# Allegro board FLASHLIGHT_V22.brd
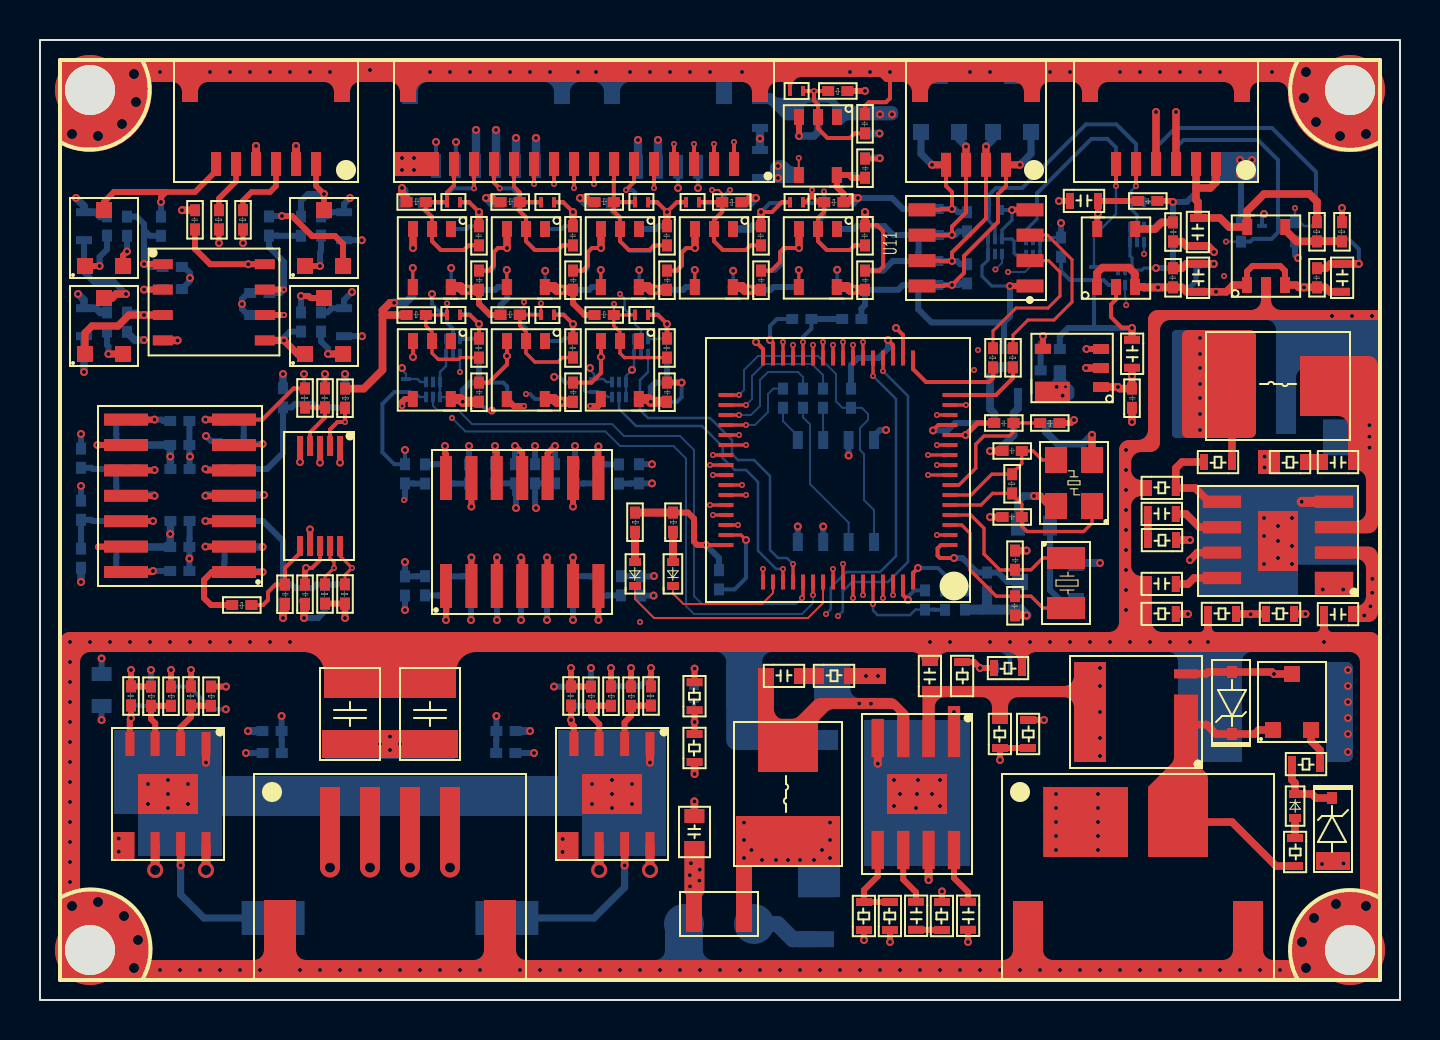
[diagram p0: board, top side]
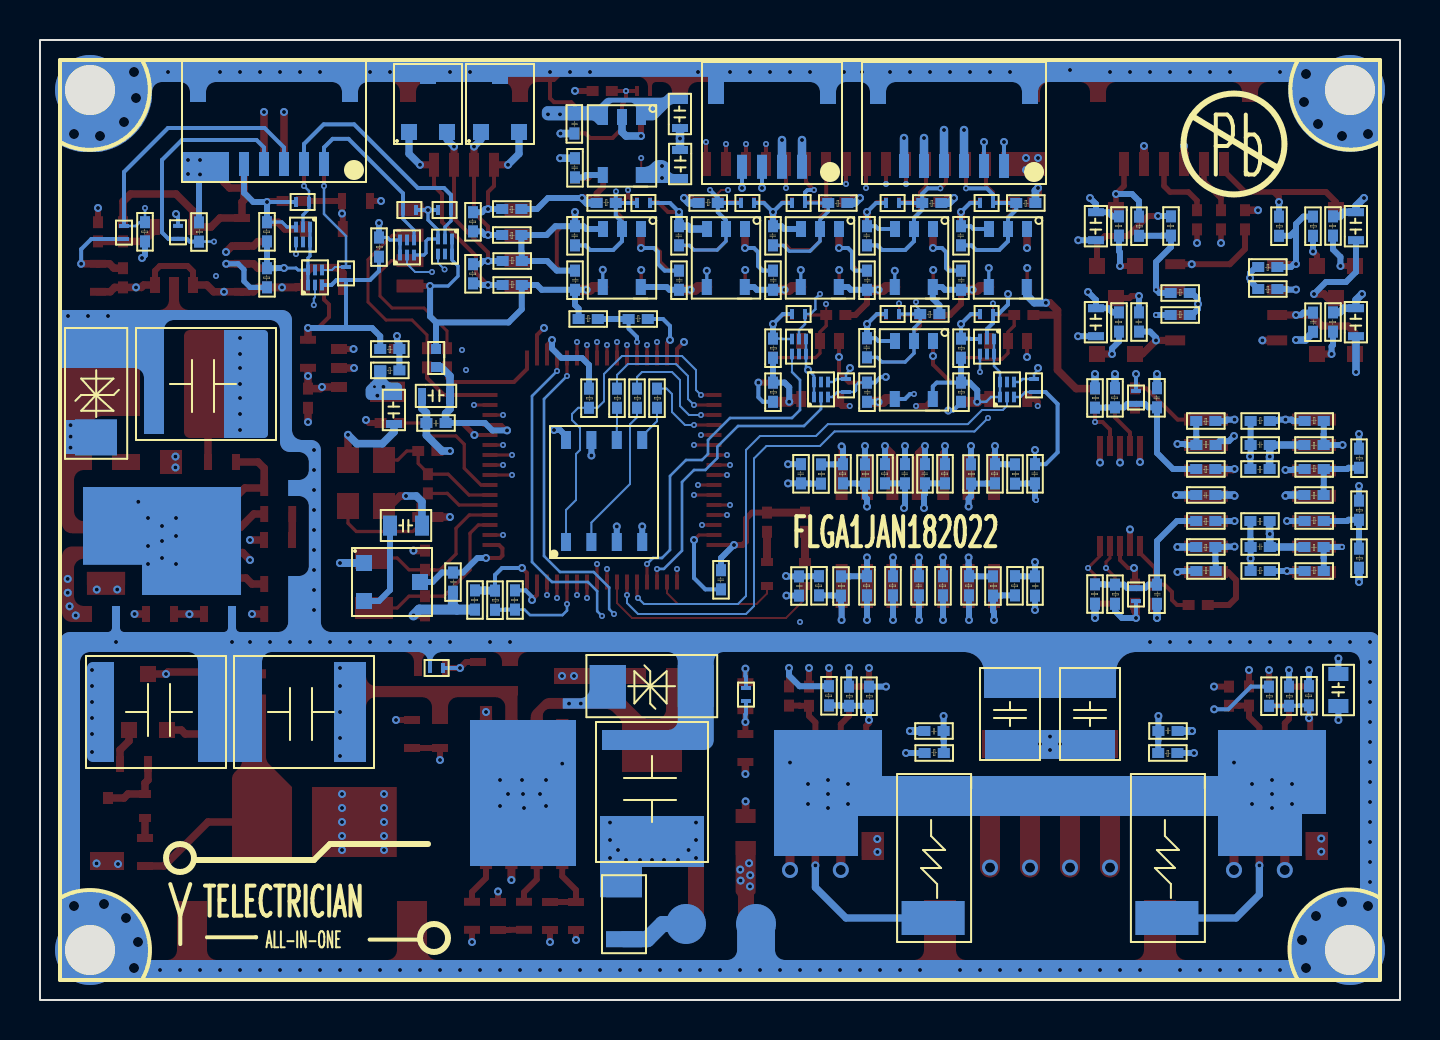
[diagram p1: board, bottom side, seen from below]

Outline 68 x 48 mm; copper layers: TOP, GND-2, SIGNAL-3, VCC-4, GND-5, SIGNAL-6, GND-7, BOTTOM. Coordinates in mm from the lower left corner of the outline.
Outline path: rectangle 0,0 68,48

## Design rules (mm)
constraint set DEFAULT: min track width 0.1

## Placement (name value [footprint] x y rotation side)
BT1  CR1220-3V  [C0805]  50.7 23.1 180 bottom
C1  0.1uF  [C0402]  10.2 25 180 bottom
C2  0.1uF  [C0402]  12.5 19.8 90 top
C3  0.1uF  [C0402]  14 30.59 270 top
C4  0.1uF  [C0402]  6.5 28 0 bottom
C5  0.1uF  [C0402]  6.5 22.9 0 bottom
C6  0.1uF  [C0402]  11.9 19.8 90 bottom
C7  0.1uF  [C0402]  13.5 19.8 90 top
C8  0.1uF  [C0603]  65.7 19.7 180 top
C9  47uF  [C2220]  59.6 14.4 0 bottom
C10  0.1uF  [C0603]  55.29 20.4 0 top
C11  5.6nF  [C0603]  55.29 23.9 0 top
C12  10nF  [C0603]  65.7 27.3 180 top
C13  47uF  [C2220]  62.3 30.8 180 bottom
C14  4.7uF  [C0603]  57.5 36.91 270 top
C15  10uF  [C0603]  51.4 39.55 0 top
C16  0.1uF  [C0402]  56.4 36.6 270 top
C17  0.1uF  [C0402]  56.9 37.91 90 top
C18  10uF  [C0603]  49.9 28.7 90 bottom
C19  4.7uF  [C0603]  54.2 33.11 270 top
C20  0.1uF  [C0402]  54.85 29.6 90 top
C21  0.1uF  [C0402]  47.7 28.6 0 top
C22  22pF  [C0402]  49.1 24.4 180 top
C23  22pF  [C0402]  49.1 27.7 180 top
C24  22pF  [C0402]  48.5 20.2 270 top
C25  22pF  [C0402]  49 21.5 90 top
C26  10uF  [C0805]  3.7 16.5 270 bottom
C27  0.1uF  [C0402]  11.11 13.7 0 bottom
C28  0.1uF  [C0402]  4.3 15.69 270 top
C29  0.1uF  [C0402]  24.3 21.2 270 bottom
C30  0.1uF  [C0402]  18 20.21 90 bottom
C31  10uF  [C0805]  32.1 9.4 270 top
C32  0.1uF  [C0402]  23.79 13.2 180 bottom
C33  0.1uF  [C0402]  26.3 15.69 270 top
C34  0.1uF  [C0402]  29.8 20.21 90 bottom
C35  0.1uF  [C0402]  30.2 26.8 270 bottom
C36  0.1uF  [C0402]  25 26.8 270 bottom
C37  0.1uF  [C0402]  34.2 21.5 270 bottom
C38  0.1uF  [C0402]  31.1 33.09 270 top
C39  0.1uF  [C0402]  26.9 33.1 270 bottom
C40  0.1uF  [C0402]  54.9 39.7 0 top
C41  0.1uF  [C0402]  26.4 29.9 90 bottom
C42  0.1uF  [C0402]  31.6 29.9 90 top
C43  0.1uF  [C0402]  26.9 29.9 90 top
C44  0.1uF  [C0402]  22.2 29.9 90 top
C45  0.1uF  [C0402]  26.4 33.09 270 top
C46  0.1uF  [C0402]  21.7 33.09 270 top
C47  0.1uF  [C0402]  4.1 33.4 90 bottom
C48  0.1uF  [C0402]  7.5 39.5 270 top
C49  0.1uF  [C0402]  13.3 34.39 270 bottom
C50  10uF  [C0603]  36.4 42.6 270 bottom
C51  4.7uF  [C0603]  35.6 43.5 90 bottom
C52  0.1uF  [C0402]  41.03 43.31 90 bottom
C53  0.1uF  [C0402]  41.5 42.1 270 bottom
C54  0.1uF  [C0402]  41.5 41.1 90 top
C55  0.1uF  [C0402]  41 35.5 90 bottom
C56  0.1uF  [C0402]  41 44.3 270 top
C57  0.1uF  [C0402]  41.5 38.7 270 bottom
C58  0.1uF  [C0402]  41.5 35.5 90 top
C59  0.1uF  [C0402]  22.2 35.5 90 top
C60  0.1uF  [C0402]  21.7 38.7 270 top
C61  0.1uF  [C0402]  41 38.7 270 top
C62  0.1uF  [C0402]  21.7 35.5 90 bottom
C63  0.1uF  [C0402]  26.9 35.5 90 top
C64  0.1uF  [C0402]  26.4 35.5 90 bottom
C65  0.1uF  [C0402]  22.2 38.7 270 bottom
C66  0.1uF  [C0402]  26.4 38.7 270 top
C67  0.1uF  [C0402]  26.9 38.7 270 bottom
C68  0.1uF  [C0402]  31.6 35.5 90 top
C69  0.1uF  [C0402]  31.1 35.5 90 bottom
C70  0.1uF  [C0402]  36.3 35.5 90 top
C71  0.1uF  [C0402]  35.8 35.5 90 bottom
C73  0.1uF  [C0402]  36.3 38.7 270 bottom
C74  0.1uF  [C0402]  35.8 38.7 270 top
C75  0.1uF  [C0402]  31.6 38.7 270 bottom
C76  0.1uF  [C0402]  31.1 38.7 270 top
C77  5.6nF  [C0603]  43.4 5.01 270 top
C78  10nF  [C0603]  36.4 15.8 0 top
C79  47uF  [C2220]  37.4 13 270 bottom
C80  0.1uF  [C0603]  46 5.01 270 top
C81  47uF  [C2220]  57.4 14.4 180 bottom
C82  0.1uF  [C0402]  12.4 30.6 270 bottom
C83  10uF  [C0603]  1.8 37.89 90 bottom
C84  10uF  [C0603]  14.8 37.89 90 bottom
C85  10uF  [C0603]  1.8 33.09 90 bottom
C86  10uF  [C0603]  14.8 33.09 90 bottom
C87  0.1uF  [C0402]  18.5 26.8 270 bottom
C88  0.1uF  [C0402]  24 26.8 270 bottom
C89  0.1uF  [C0402]  47.1 20.41 90 bottom
C90  0.1uF  [C0402]  48.69 28.6 180 bottom
C91  10uF  [C0603]  49 29.8 180 bottom
C95  0.1uF  [R0402]  21.7 29.9 90 bottom
C100  0.1uF  [R0402]  21.7 32.1 90 bottom
C101  0.1uF  [R0402]  31.1 29.9 90 bottom
C102  0.1uF  [R0402]  31.1 32.1 90 bottom
C103  0.1uF  [R0402]  56.9 38.9 270 bottom
C104  0.1uF  [R0402]  56.9 36.6 270 bottom
C105  0.1uF  [R0402]  50.8 37.16 90 bottom
C106  0.1uF  [R0402]  46.5 20.49 270 bottom
C107  4.7uF  [C0603]  64.7 36.91 270 top
C108  0.1uF  [C0402]  63.6 36.6 270 top
C109  10uF  [C0603]  58.3 37.6 90 top
C110  0.1uF  [C0603]  44.9 15.4 90 top
C111  10uF  [C1210]  19.5 12.9 90 top
C112  10uF  [C1210]  15.5 12.9 90 top
C113  10uF  [C1210]  19.5 12.9 90 bottom
C114  10uF  [C1210]  15.5 12.9 90 bottom
D1  BZT52C36V  [SOD-123]  64.6 10.1 270 top
D2  RED  [LED0402]  62.5 10.2 270 top
D3  SS35  [DO-214AC]  63.8 28 90 bottom
D4  BLUE  [LED0402]  30 20.8 90 top
D5  BLUE  [LED0402]  31.9 20.8 90 top
D25  ESD4.5V88D-C  [DFN-1006DN]  37.5 45.45 0 top
D26  ESD4.5V88D-C  [DFN-1006DN]  37.5 39.85 0 bottom
D27  ESD4.5V88D-C  [DFN-1006DN]  37.5 39.9 0 top
D28  ESD4.5V88D-C  [DFN-1006DN]  21 39.9 180 top
D29  ESD4.5V88D-C  [DFN-1006DN]  21 39.85 180 bottom
D30  ESD4.5V88D-C  [DFN-1006DN]  25.7 39.9 180 top
D31  ESD4.5V88D-C  [DFN-1006DN]  25.7 39.85 180 bottom
D32  ESD4.5V88D-C  [DFN-1006DN]  30.4 39.9 180 top
D33  ESD4.5V88D-C  [DFN-1006DN]  30.4 39.85 180 bottom
D34  ESD4.5V88D-C  [DFN-1006DN]  32.3 39.9 0 top
D35  ESD4.5V88D-C  [DFN-1006DN]  32.3 39.85 0 bottom
D36  ESD4.5V88D-C  [DFN-1006DN]  25.7 34.25 180 top
D37  ESD4.5V88D-C  [DFN-1006DN]  21 34.25 180 top
D38  ESD4.5V88D-C  [DFN-1006DN]  25.7 34.3 180 bottom
D39  ESD4.5V88D-C  [DFN-1006DN]  30.4 34.25 180 top
D41  SS35  [DO-214AC]  39.74 14.3 180 bottom
D43  BZT52C5V1  [SOD-123]  59.6 13.3 90 top
D46  ESD4.5V88D-C  [DFN-1006DN]  18.3 30.4 90 bottom
D50  ESD4.5V88D-C  [DFN-1006DN]  21 34.3 180 bottom
D51  ESD4.5V88D-C  [DFN-1006DN]  27.7 30.4 90 bottom
D52  ESD4.5V88D-C  [DFN-1006DN]  30.4 34.3 180 bottom
D53  ESD4.5V88D-C  [DFN-1006DN]  52.7 36 90 bottom
D54  ESD4.5V88D-C  [DFN-1006DN]  55.2 39.9 180 bottom
D55  ESD4.5V88D-C  [DFN-1006DN]  49.2 39.5 0 bottom
D56  ESD4.5V88D-C  [DFN-1006DN]  48.1 39.5 180 bottom
D57  ESD4.5V88D-C  [DFN-1006DN]  48.5 16.6 180 bottom
D58  ESD4.5V88D-C  [DFN-1006DN]  32.7 15.6 270 bottom
D59  ESD4.5V88D-C  [DFN-1006DN]  13.2 19.95 90 bottom
D60  ESD4.5V88D-C  [DFN-1006DN]  13.2 30.45 270 bottom
D61  ESD4.5V88D-C  [DFN-1006DN]  61.1 38.05 90 bottom
D62  ESD4.5V88D-C  [DFN-1006DN]  63.8 38.7 270 bottom
J3  Header1x4  [SMD-SH1D0-4P-HOR]  31.4 42.4 0 bottom
J4  Header1x16  [SMD-SH1D0-16P-HOR]  27.2 42.5 180 top
J7  Header1x4  [SMD-PH2D0-4P-HOR]  17.5 7 0 top
J8  Header1x6  [SMD-SH1D0-6P-HOR]  11.3 42.5 180 top
J9  Header1x4  [SMD-PH2D0-4P-HOR]  54.9 7 0 top
J11  Header1x6  [SMD-SH1D0-6P-HOR]  56.3 42.5 180 top
J12  Header1x6  [SMD-SH1D0-6P-HOR]  22.3 42.4 0 bottom
J13  Header1x4  [SMD-SH1D0-4P-HOR]  46.8 42.5 180 top
J14  Header1x6  [SMD-SH1D0-6P-HOR]  56.3 42.5 0 bottom
L1  10uH  [IND-5D7X5D2X1D8]  64 30.7 180 top
L2  10uH  [IND-5D7X5D2X1D8]  37.4 12.4 270 top
L3  1uH  [L1206]  35.2 4.3 180 top
L4  1uH  [L1206]  38.8 5.54 270 bottom
L6  BLM15BD182SN1D  [FB0402]  48.44 32.6 270 bottom
NOREF  -  []  7.16 14.26 90 top
NOREF#2  -  []  17.87 39.51 90 top
NOREF#3  -  []  2.96 37.76 0 top
NOREF#4  -  []  13.86 29.16 0 top
NOREF#5  -  []  29.16 16.13 0 top
NOREF#6  -  []  5.16 14.25 90 top
NOREF#7  -  []  44.09 17 0 top
NOREF#8  -  []  40.86 35.05 90 top
NOREF#9  -  []  33.65 39.51 0 top
NOREF#10  -  []  22.75 35.5 90 top
NOREF#11  -  []  37.76 31.03 0 top
NOREF#12  -  []  27.04 31.67 90 top
NOREF#13  -  []  27.94 14.25 90 top
NOREF#14  -  []  6.06 26.16 0 top
NOREF#15  -  []  10.67 11.96 0 top
NOREF#16  -  []  40.79 5 0 top
NOREF#17  -  []  49.55 28.46 0 top
NOREF#18  -  []  56.1 22.3 90 top
NOREF#19  -  []  25.74 19.77 90 top
NOREF#20  -  []  7.93 22.26 90 top
NOREF#21  -  []  39.84 35.65 90 top
NOREF#22  -  []  33.35 7.4 90 top
NOREF#23  -  []  17.77 39.46 0 top
NOREF#24  -  []  30.96 31.66 90 top
NOREF#25  -  []  40.45 41.1 90 top
NOREF#26  -  []  40.86 42.53 90 top
NOREF#27  -  []  21.56 31.65 90 top
NOREF#28  -  []  40.79 3.4 90 top
NOREF#29  -  []  56.26 37.47 0 top
NOREF#30  -  []  6.05 29.34 0 top
NOREF#31  -  []  46.96 21.84 0 top
NOREF#32  -  []  24.14 25.37 90 top
NOREF#33  -  []  12.66 37.75 90 top
NOREF#34  -  []  8.77 26.16 0 top
NOREF#35  -  []  56.26 35.17 0 top
NOREF#36  -  []  3.74 32.96 90 top
NOREF#37  -  []  40.86 40.67 0 top
NOREF#38  -  []  8.16 16.13 0 top
NOREF#39  -  []  28.05 38.55 0 top
NOREF#40  -  []  40.86 37.27 0 top
NOREF#41  -  []  3.96 32.95 90 top
NOREF#42  -  []  58.31 35.31 90 top
NOREF#43  -  []  20.54 30.05 90 top
NOREF#44  -  []  56.26 39.34 0 top
NOREF#45  -  []  41.64 37.27 90 top
NOREF#46  -  []  56.89 25.2 90 top
NOREF#47  -  []  24.96 19.77 0 top
NOREF#48  -  []  49.81 12.5 90 top
NOREF#49  -  []  27.56 19.76 90 top
NOREF#50  -  []  47.26 31.17 0 top
NOREF#51  -  []  24.44 19.77 90 top
NOREF#52  -  []  13.44 32.96 90 top
NOREF#53  -  []  41.64 35.05 90 top
NOREF#54  -  []  1.66 26.15 90 top
NOREF#55  -  []  14.64 29.17 90 top
NOREF#56  -  []  12.86 29.16 90 top
NOREF#57  -  []  18.86 25.36 90 top
NOREF#58  -  []  13.86 19.35 90 top
NOREF#59  -  []  14.8 34.69 0 top
NOREF#60  -  []  63.46 35.17 90 top
NOREF#61  -  []  65.51 35.31 90 top
NOREF#62  -  []  25.85 29.9 90 top
NOREF#63  -  []  47.26 31.17 90 top
NOREF#64  -  []  32.15 35.5 0 top
NOREF#65  -  []  22.47 39.46 90 top
NOREF#66  -  []  5.6 32.4 0 top
NOREF#67  -  []  35.6 45.1 0 top
NOREF#68  -  []  38.9 44.15 0 top
NOREF#69  -  []  10.05 35.74 0 top
NOREF#70  -  []  22.75 29.9 0 top
NOREF#71  -  []  63.46 35.17 0 top
NOREF#72  -  []  23.14 25.37 90 top
NOREF#73  -  []  26.26 36.93 0 top
NOREF#74  -  []  12.66 39.63 0 top
NOREF#75  -  []  22.57 34.64 0 top
NOREF#76  -  []  23.24 19.77 90 top
NOREF#77  -  []  37.95 44.15 0 top
NOREF#78  -  []  50 33.15 0 top
NOREF#79  -  []  6.05 21.84 0 top
NOREF#80  -  []  14.8 39.49 0 top
NOREF#81  -  []  36.76 29.15 90 top
NOREF#82  -  []  50 30.05 90 top
NOREF#83  -  []  49.57 31.09 90 top
NOREF#84  -  []  29.94 35.65 90 top
NOREF#85  -  []  11.84 37.76 90 top
NOREF#86  -  []  25.85 35.5 90 top
NOREF#87  -  []  11.76 19.35 90 top
NOREF#88  -  []  13.66 32.96 0 top
NOREF#89  -  []  47.67 24.54 0 top
NOREF#90  -  []  11.8 32.4 90 top
NOREF#91  -  []  54.21 31.03 90 top
NOREF#92  -  []  37.35 41.1 0 top
NOREF#93  -  []  7.36 38.07 90 top
NOREF#94  -  []  29.44 19.77 90 top
NOREF#95  -  []  46.81 3.41 90 top
NOREF#96  -  []  47.59 12.5 90 top
NOREF#97  -  []  30.96 31.66 0 top
NOREF#98  -  []  22.57 39.51 90 top
NOREF#99  -  []  56.33 39.56 90 top
NOREF#100  -  []  11.03 19.36 90 top
NOREF#101  -  []  52.25 38.7 0 top
NOREF#102  -  []  6.06 23.56 90 top
NOREF#103  -  []  40.86 37.27 0 top
NOREF#104  -  []  57.49 39.2 0 top
NOREF#105  -  []  55.35 35.5 90 top
NOREF#106  -  []  22.46 19.77 0 top
NOREF#107  -  []  5.66 37.75 90 top
NOREF#108  -  []  61.7 26.49 0 top
NOREF#109  -  []  43.4 5.82 0 top
NOREF#110  -  []  58.1 26.49 0 top
NOREF#111  -  []  46 3.41 0 top
NOREF#112  -  []  49.45 21.1 90 top
NOREF#113  -  []  64.1 18.89 0 top
NOREF#114  -  []  7.93 27.36 90 top
NOREF#115  -  []  53 39.55 90 top
NOREF#116  -  []  55.3 22.59 0 top
NOREF#117  -  []  7.93 28.56 90 top
NOREF#118  -  []  21.56 33.53 0 top
NOREF#119  -  []  55.29 22.3 0 top
NOREF#120  -  []  27.56 21.64 0 top
NOREF#121  -  []  59.9 18.9 90 top
NOREF#122  -  []  38.9 16.61 0 top
NOREF#123  -  []  37.35 41.1 90 top
NOREF#124  -  []  61.2 19.71 0 top
NOREF#125  -  []  27.04 35.05 90 top
NOREF#126  -  []  35.66 37.27 90 top
NOREF#127  -  []  10.66 13.84 0 top
NOREF#128  -  []  18.05 35.5 90 top
NOREF#129  -  []  14.86 31.03 0 top
NOREF#130  -  []  29.66 21.64 0 top
NOREF#131  -  []  29.94 14.25 90 top
NOREF#132  -  []  40.86 36.93 0 top
NOREF#133  -  []  35.66 37.27 0 top
NOREF#134  -  []  28.94 14.27 90 top
NOREF#135  -  []  62.35 6.6 0 top
NOREF#136  -  []  26.26 37.27 0 top
NOREF#137  -  []  2.61 34.69 0 top
NOREF#138  -  []  37.95 38.55 0 top
NOREF#139  -  []  21.56 35.05 90 top
NOREF#140  -  []  35.25 35.5 90 top
NOREF#141  -  []  5.67 36.26 90 top
NOREF#142  -  []  5.16 16.13 0 top
NOREF#143  -  []  32.04 22.95 90 top
NOREF#144  -  []  40.86 36.93 0 top
NOREF#145  -  []  24.23 11.96 90 top
NOREF#146  -  []  64.71 37.47 0 top
NOREF#147  -  []  19.96 19.76 90 top
NOREF#148  -  []  47.67 27.06 90 top
NOREF#149  -  []  6.16 16.13 0 top
NOREF#150  -  []  30.55 35.5 90 top
NOREF#151  -  []  17.86 19.76 90 top
NOREF#152  -  []  22.34 29.45 90 top
NOREF#153  -  []  51.43 28.46 90 top
NOREF#154  -  []  21.15 35.5 90 top
NOREF#155  -  []  56.26 35.17 0 top
NOREF#156  -  []  47.26 28.46 90 top
NOREF#157  -  []  17.87 40.29 0 top
NOREF#158  -  []  0 48 0 top
NOREF#159  -  []  21.56 37.27 90 top
NOREF#160  -  []  40.83 45.06 90 top
NOREF#161  -  []  37.96 41.25 90 top
NOREF#162  -  []  18.05 35.5 0 top
NOREF#163  -  []  18.86 19.77 0 top
NOREF#164  -  []  24.3 38.55 0 top
NOREF#165  -  []  49.57 31.09 0 top
NOREF#166  -  []  29.56 25.37 0 top
NOREF#167  -  []  30.14 22.95 90 top
NOREF#168  -  []  12.66 32.96 0 top
NOREF#169  -  []  24.3 32.95 0 top
NOREF#170  -  []  40.16 29.15 90 top
NOREF#171  -  []  3.35 26.94 0 top
NOREF#172  -  []  47.67 23.76 90 top
NOREF#173  -  []  2.96 32.96 0 top
NOREF#174  -  []  28.16 14.27 0 top
NOREF#175  -  []  17.87 34.64 0 top
NOREF#176  -  []  15.61 33.09 90 top
NOREF#177  -  []  27.04 19.77 90 top
NOREF#178  -  []  13.86 21.23 0 top
NOREF#179  -  []  44.1 40.2 0 top
NOREF#180  -  []  38 15.8 90 top
NOREF#181  -  []  52.85 35.65 90 top
NOREF#182  -  []  23.14 25.37 90 top
NOREF#183  -  []  27.45 35.5 0 top
NOREF#184  -  []  22.34 35.05 90 top
NOREF#185  -  []  23.35 38.55 0 top
NOREF#186  -  []  9.76 38.07 90 top
NOREF#187  -  []  14.86 31.04 0 top
NOREF#188  -  []  12.86 21.23 0 top
NOREF#189  -  []  38.75 39.51 0 top
NOREF#190  -  []  1.66 21.15 90 top
NOREF#191  -  []  8.77 24.86 90 top
NOREF#192  -  []  36.4 16.61 0 top
NOREF#193  -  []  29.66 19.76 90 top
NOREF#194  -  []  5.23 21.06 90 top
NOREF#195  -  []  21.56 31.66 90 top
NOREF#196  -  []  67.3 27.3 90 top
NOREF#197  -  []  5.67 35.16 0 top
NOREF#198  -  []  1.8 34.69 0 top
NOREF#199  -  []  57.5 35.31 0 top
NOREF#200  -  []  32.75 38.55 0 top
NOREF#201  -  []  66.59 28 90 top
NOREF#202  -  []  56.89 20.4 90 top
NOREF#203  -  []  5.67 35.16 90 top
NOREF#204  -  []  13.86 19.36 0 top
NOREF#205  -  []  13.86 19.36 90 top
NOREF#206  -  []  61.7 26.49 90 top
NOREF#207  -  []  19.86 25.37 0 top
NOREF#208  -  []  30.96 37.27 90 top
NOREF#209  -  []  55.29 21.21 0 top
NOREF#210  -  []  11.93 33.86 90 top
NOREF#211  -  []  56.89 19.71 90 top
NOREF#212  -  []  1.8 39.49 0 top
NOREF#213  -  []  40.45 35.5 90 top
NOREF#214  -  []  47.25 28.46 0 top
NOREF#215  -  []  27.16 16.13 0 top
NOREF#216  -  []  48.26 31.17 90 top
NOREF#217  -  []  26.16 14.26 90 top
NOREF#218  -  []  41.64 40.65 90 top
NOREF#219  -  []  8.77 28.56 0 top
NOREF#220  -  []  30.96 29.45 90 top
NOREF#221  -  []  3.36 24.86 0 top
NOREF#222  -  []  22.57 33.91 90 top
NOREF#223  -  []  2.45 14.5 90 top
NOREF#224  -  []  23.36 25.37 0 top
NOREF#225  -  []  40.86 42.87 0 top
NOREF#226  -  []  60.35 35.75 90 top
NOREF#227  -  []  30.96 31.33 0 top
NOREF#228  -  []  64.7 35.31 0 top
NOREF#229  -  []  44.1 35.7 0 top
NOREF#230  -  []  40.86 37.27 90 top
NOREF#231  -  []  17.77 39.46 90 top
NOREF#232  -  []  8.76 21.84 0 top
NOREF#233  -  []  39.03 33.66 90 top
NOREF#234  -  []  48.36 18.77 0 top
NOREF#235  -  []  17.87 33.86 90 top
NOREF#236  -  []  46.64 19.06 90 top
NOREF#237  -  []  22.47 39.46 0 top
NOREF#238  -  []  48.36 22.93 0 top
NOREF#239  -  []  5.23 23.56 90 top
NOREF#240  -  []  46.74 35.37 90 top
NOREF#241  -  []  44.1 35.7 90 top
NOREF#242  -  []  64.1 18.89 90 top
NOREF#243  -  []  48.26 31.17 0 top
NOREF#244  -  []  50.66 38.59 0 top
NOREF#245  -  []  33.7 38.55 0 top
NOREF#246  -  []  43.47 37.86 0 top
NOREF#247  -  []  6.94 14.25 90 top
NOREF#248  -  []  35.66 36.93 0 top
NOREF#249  -  []  10.05 34.64 0 top
NOREF#250  -  []  60.35 35.75 0 top
NOREF#251  -  []  40.63 39.51 90 top
NOREF#252  -  []  18.64 25.37 90 top
NOREF#253  -  []  43.86 19.06 0 top
NOREF#254  -  []  36.44 37.27 90 top
NOREF#255  -  []  19.96 21.64 0 top
NOREF#256  -  []  35.66 36.93 0 top
NOREF#257  -  []  8.77 23.56 0 top
NOREF#258  -  []  21.56 37.27 0 top
NOREF#259  -  []  1.66 23.03 0 top
NOREF#260  -  []  28.56 25.36 90 top
NOREF#261  -  []  21.56 31.33 0 top
NOREF#262  -  []  25.24 35.65 90 top
NOREF#263  -  []  35.14 17.09 0 top
NOREF#264  -  []  28.94 14.25 90 top
NOREF#265  -  []  38.75 40.24 0 top
NOREF#266  -  []  9.76 38.07 0 top
NOREF#267  -  []  8.56 38.07 90 top
NOREF#268  -  []  37.76 29.15 90 top
NOREF#269  -  []  3.96 34.83 0 top
NOREF#270  -  []  43.45 36.14 0 top
NOREF#271  -  []  22.75 35.5 0 top
NOREF#272  -  []  25.36 25.37 0 top
NOREF#273  -  []  26.26 36.93 0 top
NOREF#274  -  []  22.36 13.06 0 top
NOREF#275  -  []  41.53 33.66 90 top
NOREF#276  -  []  5.94 14.25 90 top
NOREF#277  -  []  6.06 23.56 0 top
NOREF#278  -  []  28.24 25.37 90 top
NOREF#279  -  []  14.44 32.96 90 top
NOREF#280  -  []  48.36 18.77 90 top
NOREF#281  -  []  35.59 41 0 top
NOREF#282  -  []  37.35 41.1 0 top
NOREF#283  -  []  35.53 39.51 90 top
NOREF#284  -  []  22.57 40.29 0 top
NOREF#285  -  []  47.67 27.84 0 top
NOREF#286  -  []  6.16 14.25 90 top
NOREF#287  -  []  32.15 35.5 90 top
NOREF#288  -  []  27.27 40.29 0 top
NOREF#289  -  []  27.16 14.25 90 top
NOREF#290  -  []  35.14 14.3 90 top
NOREF#291  -  []  5.23 28.56 90 top
NOREF#292  -  []  40.16 31.03 0 top
NOREF#293  -  []  19.6 38.55 0 top
NOREF#294  -  []  2.5 45.5 0 top
NOREF#295  -  []  18.86 27.24 0 top
NOREF#296  -  []  40.86 42.87 90 top
NOREF#297  -  []  59.66 39.34 0 top
NOREF#298  -  []  8.77 26.16 90 top
NOREF#299  -  []  57.49 37.6 90 top
NOREF#300  -  []  50.71 28.7 90 top
NOREF#301  -  []  3.36 27.36 90 top
NOREF#302  -  []  26.14 25.37 90 top
NOREF#303  -  []  57.04 37.47 90 top
NOREF#304  -  []  45 5.01 90 top
NOREF#305  -  []  22.57 33.91 0 top
NOREF#306  -  []  26.26 29.45 90 top
NOREF#307  -  []  29 38.55 0 top
NOREF#308  -  []  14.86 19.36 90 top
NOREF#309  -  []  40.5 15.8 90 top
NOREF#310  -  []  46.96 19.95 90 top
NOREF#311  -  []  44.86 20.93 0 top
NOREF#312  -  []  14.86 19.36 0 top
NOREF#313  -  []  27.17 39.46 0 top
NOREF#314  -  []  21.94 19.77 90 top
NOREF#315  -  []  58.1 26.49 90 top
NOREF#316  -  []  36.41 43.5 90 top
NOREF#317  -  []  3.74 37.76 90 top
NOREF#318  -  []  36.44 35.05 90 top
NOREF#319  -  []  56.89 18.9 90 top
NOREF#320  -  []  1.66 25.43 0 top
NOREF#321  -  []  53.05 30.65 90 top
NOREF#322  -  []  3.35 21.84 0 top
NOREF#323  -  []  22.34 37.27 90 top
NOREF#324  -  []  22.75 35.5 0 top
NOREF#325  -  []  53.05 30.65 90 top
NOREF#326  -  []  7.16 14.26 90 top
NOREF#327  -  []  4.16 14.26 90 top
NOREF#328  -  []  34.34 20.07 90 top
NOREF#329  -  []  5.66 39.63 0 top
NOREF#330  -  []  30.96 31.65 90 top
NOREF#331  -  []  40.63 39.46 90 top
NOREF#332  -  []  30.34 25.37 90 top
NOREF#333  -  []  28.06 35.65 90 top
NOREF#334  -  []  27.45 29.9 0 top
NOREF#335  -  []  45.96 37.97 0 top
NOREF#336  -  []  10.67 11.96 90 top
NOREF#337  -  []  4.16 14.26 0 top
NOREF#338  -  []  19.6 32.95 0 top
NOREF#339  -  []  32.15 35.5 0 top
NOREF#340  -  []  65.7 28.11 0 top
NOREF#341  -  []  47.4 29.8 90 top
NOREF#342  -  []  47.59 14.1 0 top
NOREF#343  -  []  26.36 25.36 90 top
NOREF#344  -  []  13.86 29.16 90 top
NOREF#345  -  []  47.4 30.61 0 top
NOREF#346  -  []  21.56 36.93 0 top
NOREF#347  -  []  30.96 36.93 0 top
NOREF#348  -  []  63.16 6.6 90 top
NOREF#349  -  []  27.27 39.51 90 top
NOREF#350  -  []  27.45 35.5 90 top
NOREF#351  -  []  46.74 37.97 90 top
NOREF#352  -  []  30.96 36.93 0 top
NOREF#353  -  []  27.04 29.45 90 top
NOREF#354  -  []  18.05 35.5 0 top
NOREF#355  -  []  62.8 18.9 90 top
NOREF#356  -  []  58.3 19.71 0 top
NOREF#357  -  []  13.66 37.76 0 top
NOREF#358  -  []  44.09 15.4 90 top
NOREF#359  -  []  43.47 39.16 0 top
NOREF#360  -  []  45.33 35.36 90 top
NOREF#361  -  []  44.86 19.05 90 top
NOREF#362  -  []  21.56 31.33 0 top
NOREF#363  -  []  37.35 35.5 0 top
NOREF#364  -  []  54.99 29.15 90 top
NOREF#365  -  []  14.86 29.16 90 top
NOREF#366  -  []  13.64 19.35 90 top
NOREF#367  -  []  27.46 25.37 0 top
NOREF#368  -  []  36.76 31.03 0 top
NOREF#369  -  []  43.45 37.34 0 top
NOREF#370  -  []  49.9 30.3 0 top
NOREF#371  -  []  39.84 41.25 90 top
NOREF#372  -  []  26.26 31.33 0 top
NOREF#373  -  []  40.9 42.86 90 top
NOREF#374  -  []  35.59 41 90 top
NOREF#375  -  []  48.22 24.87 0 top
NOREF#376  -  []  30.96 37.27 0 top
NOREF#377  -  []  27.04 37.27 90 top
NOREF#378  -  []  38.9 38.55 0 top
NOREF#379  -  []  26.26 37.27 90 top
NOREF#380  -  []  12.64 19.35 90 top
NOREF#381  -  []  53 40.36 90 top
NOREF#382  -  []  10.64 21.06 90 top
NOREF#383  -  []  3.36 22.26 90 top
NOREF#384  -  []  50.3 35 90 top
NOREF#385  -  []  22.57 33.86 90 top
NOREF#386  -  []  41.67 44.74 90 top
NOREF#387  -  []  8.76 28.14 0 top
NOREF#388  -  []  64.71 37.47 90 top
NOREF#389  -  []  46.51 15.4 90 top
NOREF#390  -  []  10.64 27.36 90 top
NOREF#391  -  []  27.45 29.9 90 top
NOREF#392  -  []  23.36 30.05 90 top
NOREF#393  -  []  56.26 35.17 90 top
NOREF#394  -  []  6.05 23.04 0 top
NOREF#395  -  []  63.46 37.47 90 top
NOREF#396  -  []  29 32.95 0 top
NOREF#397  -  []  41.64 40.67 90 top
NOREF#398  -  []  57.04 35.17 90 top
NOREF#399  -  []  17.86 25.37 0 top
NOREF#400  -  []  21.56 31.66 0 top
NOREF#401  -  []  5.16 16.13 0 top
NOREF#402  -  []  32.32 15.99 0 top
NOREF#403  -  []  18.66 35.65 90 top
NOREF#404  -  []  57.04 37.46 90 top
NOREF#405  -  []  55.01 31.51 90 top
NOREF#406  -  []  8.77 22.26 90 top
NOREF#407  -  []  23.36 35.65 90 top
NOREF#408  -  []  63.8 32.6 0 top
NOREF#409  -  []  3.36 27.36 0 top
NOREF#410  -  []  3.36 24.86 90 top
NOREF#411  -  []  26.26 31.67 0 top
NOREF#412  -  []  17.86 21.64 0 top
NOREF#413  -  []  35.66 35.05 90 top
NOREF#414  -  []  26.26 31.66 90 top
NOREF#415  -  []  12.54 29.17 90 top
NOREF#416  -  []  37.15 34.44 0 top
NOREF#417  -  []  8.56 38.07 0 top
NOREF#418  -  []  15.64 29.15 90 top
NOREF#419  -  []  26.26 31.66 90 top
NOREF#420  -  []  26.26 37.27 0 top
NOREF#421  -  []  42.09 3.4 90 top
NOREF#422  -  []  21.56 37.27 0 top
NOREF#423  -  []  14.86 19.36 0 top
NOREF#424  -  []  21.06 25.36 90 top
NOREF#425  -  []  11.86 21.23 0 top
NOREF#426  -  []  54.45 39.56 0 top
NOREF#427  -  []  63.46 37.47 0 top
NOREF#428  -  []  54.2 31.51 0 top
NOREF#429  -  []  4.94 14.27 90 top
NOREF#430  -  []  22.75 29.9 0 top
NOREF#431  -  []  27.45 35.5 0 top
NOREF#432  -  []  34.64 35.65 90 top
NOREF#433  -  []  35.53 39.46 90 top
NOREF#434  -  []  2.5 2.5 90 top
NOREF#435  -  []  21.56 36.93 0 top
NOREF#436  -  []  46.74 35.37 90 top
NOREF#437  -  []  63.14 37.47 90 top
NOREF#438  -  []  21.56 29.45 90 top
NOREF#439  -  []  8.77 28.56 90 top
NOREF#440  -  []  8.77 24.86 0 top
NOREF#441  -  []  37.96 35.65 90 top
NOREF#442  -  []  3.96 39.63 0 top
NOREF#443  -  []  8.77 22.26 0 top
NOREF#444  -  []  9.15 19.36 0 top
NOREF#445  -  []  3.35 24.34 0 top
NOREF#446  -  []  29.36 24.83 90 top
NOREF#447  -  []  5.23 26.16 90 top
NOREF#448  -  []  62.5 11.39 0 top
NOREF#449  -  []  28.66 19.77 0 top
NOREF#450  -  []  47.94 31.6 90 top
NOREF#451  -  []  45.86 19.06 0 top
NOREF#452  -  []  26.16 14.25 90 top
NOREF#453  -  []  22.75 29.9 90 top
NOREF#454  -  []  48.22 24.87 90 top
NOREF#455  -  []  30.96 37.27 0 top
NOREF#456  -  []  49.57 32.16 90 top
NOREF#457  -  []  20.54 35.65 90 top
NOREF#458  -  []  47.6 16.19 90 top
NOREF#459  -  []  32.32 14.39 90 top
NOREF#460  -  []  30.96 31.33 0 top
NOREF#461  -  []  7.93 21.06 90 top
NOREF#462  -  []  12.86 29.16 0 top
NOREF#463  -  []  52.85 35.65 0 top
NOREF#464  -  []  49.13 28.46 90 top
NOREF#465  -  []  26.26 19.77 0 top
NOREF#466  -  []  29.94 30.05 90 top
NOREF#467  -  []  39.65 34.44 0 top
NOREF#468  -  []  12.54 13.06 90 top
NOREF#469  -  []  50.7 21.1 90 top
NOREF#470  -  []  33.65 40.24 0 top
NOREF#471  -  []  25.14 25.37 90 top
NOREF#472  -  []  26.26 31.33 0 top
NOREF#473  -  []  31.74 29.45 90 top
NOREF#474  -  []  33.56 20.07 0 top
NOREF#475  -  []  3.96 37.75 90 top
NOREF#476  -  []  13.86 29.17 0 top
NOREF#477  -  []  6.06 26.16 0 top
NOREF#478  -  []  19.64 19.77 90 top
NOREF#479  -  []  7.36 38.07 0 top
NOREF#480  -  []  30.96 33.53 0 top
NOREF#481  -  []  32.1 7.4 90 top
NOREF#482  -  []  32.32 13.4 0 top
NOREF#483  -  []  28.56 27.24 0 top
NOREF#484  -  []  8.77 23.56 90 top
NOREF#485  -  []  11.93 34.96 90 top
NOREF#486  -  []  38.76 31.03 0 top
NOREF#487  -  []  26.16 14.26 0 top
NOREF#488  -  []  59.66 37.46 90 top
NOREF#489  -  []  27.27 34.64 0 top
NOREF#490  -  []  28.16 16.13 0 top
NOREF#491  -  []  30.16 14.26 90 top
NOREF#492  -  []  5.67 36.26 0 top
NOREF#493  -  []  25.24 30.05 90 top
NOREF#494  -  []  22.35 12.74 0 top
NOREF#495  -  []  59.75 38.8 0 top
NOREF#496  -  []  20.64 25.37 90 top
NOREF#497  -  []  4.16 14.27 0 top
NOREF#498  -  []  32.76 35.65 90 top
NOREF#499  -  []  26.16 16.13 0 top
NOREF#500  -  []  31.74 35.05 90 top
NOREF#501  -  []  42.09 5 0 top
NOREF#502  -  []  47.6 16.19 0 top
NOREF#503  -  []  24.36 25.37 0 top
NOREF#504  -  []  3.35 29.34 0 top
NOREF#505  -  []  2.61 37.89 90 top
NOREF#506  -  []  43.47 37.86 90 top
NOREF#507  -  []  49.14 21.05 90 top
NOREF#508  -  []  18.05 29.9 0 top
NOREF#509  -  []  11.76 21.23 0 top
NOREF#510  -  []  15.64 19.36 90 top
NOREF#511  -  []  1.66 23.55 90 top
NOREF#512  -  []  26.26 35.05 90 top
NOREF#513  -  []  44.69 5 0 top
NOREF#514  -  []  0 0 90 top
NOREF#515  -  []  1.66 28.03 0 top
NOREF#516  -  []  11.06 37.76 0 top
NOREF#517  -  []  3.36 22.26 0 top
NOREF#518  -  []  23.66 19.77 0 top
NOREF#519  -  []  37.35 35.5 0 top
NOREF#520  -  []  50.66 36.7 90 top
NOREF#521  -  []  8.94 14.25 90 top
NOREF#522  -  []  37.35 35.5 90 top
NOREF#523  -  []  38.95 45.06 0 top
NOREF#524  -  []  62.5 11.39 90 top
NOREF#525  -  []  62.36 37.47 0 top
NOREF#526  -  []  26.36 27.24 0 top
NOREF#527  -  []  55.3 22.59 90 top
NOREF#528  -  []  47.26 28.46 0 top
NOREF#529  -  []  23.35 32.95 0 top
NOREF#530  -  []  35.66 37.27 0 top
NOREF#531  -  []  43.47 39.16 90 top
NOREF#532  -  []  27.16 16.13 0 top
NOREF#533  -  []  30.16 14.26 0 top
NOREF#534  -  []  38.76 29.15 90 top
NOREF#535  -  []  21.16 19.77 0 top
NOREF#536  -  []  18.05 29.9 90 top
NOREF#537  -  []  21.06 27.24 0 top
NOREF#538  -  []  31.74 37.27 90 top
NOREF#539  -  []  3.7 14.5 90 top
NOREF#540  -  []  49.57 32.16 0 top
NOREF#541  -  []  15.61 37.89 90 top
NOREF#542  -  []  45.33 36.56 90 top
NOREF#543  -  []  62.85 35.6 90 top
NOREF#544  -  []  32.32 11.8 90 top
NOREF#545  -  []  14.44 37.76 90 top
NOREF#546  -  []  44.64 19.06 90 top
NOREF#547  -  []  6.05 28.14 0 top
NOREF#548  -  []  11.76 29.17 0 top
NOREF#549  -  []  18.65 38.55 0 top
NOREF#550  -  []  27.27 33.86 90 top
NOREF#551  -  []  27.17 39.46 90 top
NOREF#552  -  []  6.16 16.13 0 top
NOREF#553  -  []  31.26 24.83 0 top
NOREF#554  -  []  44.69 3.4 90 top
NOREF#555  -  []  30.96 35.05 90 top
NOREF#556  -  []  49 12.5 0 top
NOREF#557  -  []  22.36 13.06 90 top
NOREF#558  -  []  45.7 15.4 0 top
NOREF#559  -  []  55.29 26.01 0 top
Q1  2SB1116  [SOT-23-3]  62.6 14.9 0 top
Q4  NCE55P05S  [SOP-8]  52.3 12.5 90 top
Q5  S8550  [SOT-23-3]  3.2 38.1 0 top
Q6  S8550  [SOT-23-3]  14.2 38.1 0 top
Q7  BAT54CW  [SOT-323]  50.4 20.9 270 bottom
R1  10K  [R0402]  9.21 21.7 0 bottom
R2  DNP  [R0402]  10.2 22.4 180 bottom
R3  5K  [R0402]  10.2 23.7 180 bottom
R4  100  [R0402]  9.6 19.5 0 top
R5  10K  [R0402]  10.2 28.7 180 bottom
R6  100  [R0402]  13 30.59 270 top
R7  DNP  [R0402]  9.21 28 0 bottom
R8  5K  [R0402]  10.2 26.3 180 bottom
R9  10K  [R0402]  3.8 29.2 0 bottom
R10  100  [R0402]  6.5 29.2 0 bottom
R11  DNP  [R0402]  4.79 27.5 180 bottom
R12  5K  [R0402]  3.8 26.8 0 bottom
R13  10K  [R0402]  3.8 21.7 0 bottom
R14  DNP  [R0402]  4.79 22.4 180 bottom
R15  100  [R0402]  6.5 21.7 0 bottom
R16  5K  [R0402]  3.8 24.2 0 bottom
R17  16.2K  [R0402]  15.5 20.79 270 bottom
R18  16.2K  [R0402]  14 19.8 90 bottom
R19  10K  [R0402]  15 20.79 270 top
R20  10K  [R0402]  14 20.79 270 top
R21  10K  [R0402]  15.5 29.6 90 top
R22  2K  [R0603]  62.35 8.2 270 top
R23  200  [R0603]  64.1 12.2 180 top
R24  5.49K  [R0603]  55.29 18.9 0 top
R26  6.49K  [R0603]  56.9 23.4 180 top
R27  10  [R0603]  63.3 27.3 180 top
R28  6.28K  [R0603]  55.29 25.2 0 top
R29  33K  [R0603]  59.7 27.3 180 top
R30  20K  [R0603]  61.2 18.9 0 top
R31  2K  [R0603]  58.3 18.9 0 top
R32  47K  [R0402]  51 32.3 180 bottom
R33  147K  [R0402]  51 31.23 180 bottom
R34  10K  [R0402]  50 28.6 0 top
R37  2K  [R0402]  31.9 23.4 90 top
R38  2K  [R0402]  30 23.4 90 top
R39  10K  [R0402]  5.8 14.7 90 top
R40  10K  [R0402]  7.3 15.69 270 top
R41  1K  [R0402]  6.8 14.7 90 top
R42  1K  [R0402]  8.8 14.7 90 top
R43  0.2  [R2010]  11.65 10.1 270 bottom
R44  1K  [R0402]  12.1 12.1 180 bottom
R45  DNP  [R0402]  5.3 14.7 90 bottom
R46  DNP  [R0402]  4.8 15.7 270 bottom
R47  0  [R0402]  6.3 14.7 90 bottom
R48  5K  [R0402]  23.1 21.2 270 bottom
R49  10K  [R0402]  20.1 20.21 90 bottom
R50  10K  [R0402]  21.8 21.2 270 bottom
R51  1K  [R0402]  19.5 21.2 270 bottom
R52  10K  [R0402]  27.8 14.7 90 top
R53  1K  [R0402]  28.8 14.7 90 top
R54  1K  [R0402]  29.8 14.7 90 top
R55  1K  [R0402]  22.8 12.6 0 bottom
R56  10K  [R0402]  30.3 15.69 270 top
R57  0.2  [R2010]  23.34 10.1 270 bottom
R58  DNP  [R0402]  27.3 14.7 90 bottom
R59  DNP  [R0402]  28.8 15.7 270 bottom
R60  0  [R0402]  26.3 14.7 90 bottom
R61  5K  [R0402]  25.6 21.2 270 bottom
R62  10K  [R0402]  26.9 21.2 270 bottom
R63  10K  [R0402]  27.7 20.21 90 bottom
R64  1K  [R0402]  29.3 21.2 270 bottom
R65  10K  [R0402]  26.5 25.81 90 bottom
R66  10K  [R0402]  28.1 26.8 270 bottom
R67  1K  [R0402]  28.7 25.81 90 bottom
R68  5K  [R0402]  26 26.8 270 bottom
R69  16.2K  [R0603]  33.13 11.8 90 top
R70  2.94K  [R0603]  33.13 14.39 90 top
R71  1Meg  [R0402]  48.35 26.3 270 top
R72  10K  [R0402]  40.3 29.6 90 bottom
R73  33  [R0402]  38.9 29.6 90 bottom
R74  33  [R0402]  36.9 29.6 90 bottom
R75  33  [R0402]  37.9 29.6 90 bottom
R78  0  [R0402]  1.8 26.6 90 bottom
R79  DNP  [R0402]  4.79 25 180 bottom
R80  0  [R0402]  1.8 24 90 bottom
R81  DNP  [R0402]  1.8 21.6 90 bottom
R82  10K  [R0402]  28.7 34.5 180 top
R83  10K  [R0402]  24 34.05 180 bottom
R84  120  [R0402]  46.6 36.8 270 bottom
R85  120  [R0402]  46.6 39.4 270 bottom
R86  0  [R0402]  47.4 32.6 270 top
R87  0  [R0402]  48.4 32.6 270 top
R88  10K  [R0402]  19.3 34.5 180 top
R89  10K  [R0402]  24 34.5 180 top
R90  1K  [R0402]  7.1 35.3 180 bottom
R91  2.5K  [R0402]  3.6 39.19 270 bottom
R92  200  [R0402]  4.1 38.2 90 bottom
R93  1.25K  [R0402]  3.6 34.39 270 bottom
R94  0  [R0402]  8.7 39.5 270 top
R95  DNP  [R0402]  5.8 38.2 90 bottom
R96  DNP  [R0402]  7.1 36.4 180 bottom
R97  1.25K  [R0402]  14.3 34.39 270 bottom
R98  2.5K  [R0402]  14.3 39.19 270 bottom
R99  1K  [R0402]  10.5 34.5 0 bottom
R100  DNP  [R0402]  10.5 35.6 0 bottom
R101  200  [R0402]  11.7 39.19 270 bottom
R102  DNP  [R0402]  12.8 38.2 90 bottom
R103  0  [R0402]  9.9 39.5 270 top
R104  10K  [R0402]  39.2 40.1 0 bottom
R105  10K  [R0402]  39.4 45.2 0 top
R106  10K  [R0402]  23.9 39.6 180 bottom
R107  10K  [R0402]  24 40.15 180 top
R108  10K  [R0402]  19.2 39.6 180 bottom
R109  10K  [R0402]  19.3 40.15 180 top
R110  10K  [R0402]  39.2 39.65 0 top
R112  10K  [R0402]  34.1 40.1 0 bottom
R113  10K  [R0402]  34.1 39.65 0 top
R114  10K  [R0402]  28.6 39.6 180 bottom
R115  10K  [R0402]  28.7 40.15 180 top
R116  10  [R0603]  38.9 15.8 0 top
R117  33K  [R0603]  41.6 3.4 90 top
R118  2.37K  [R0603]  42.9 3.4 90 top
R119  6.28K  [R0603]  45.5 3.4 90 top
R120  20K  [R0603]  48.4 12.5 90 top
R121  2K  [R0603]  49 14.1 270 top
R122  16.2K  [R0402]  15 29.61 90 bottom
R123  8.25K  [R0402]  14.5 30.6 270 bottom
R124  DNP  [R0402]  7.49 23.7 180 bottom
R125  DNP  [R0402]  7.49 26.3 180 bottom
R126  DNP  [R0402]  43.9 36 0 bottom
R127  DNP  [R0402]  43.9 37.2 0 bottom
R128  DNP  [R0402]  44.9 39.3 180 bottom
R129  DNP  [R0402]  44.9 38 180 bottom
R130  DNP  [R0402]  21.2 25.81 90 bottom
R131  10K  [R0402]  20.5 26.8 270 bottom
R132  5K  [R0402]  23 26.8 270 bottom
R133  1K  [R0402]  19 25.81 90 bottom
R134  16.2K  [R0603]  45.7 17 270 top
R135  1.62K  [R0603]  49.2 17 180 top
R144  0  [R0402]  40.1 34.3 0 bottom
R145  DNP  [R0402]  45 19.5 90 bottom
R146  DNP  [R0402]  37.6 34.3 0 bottom
R147  0  [R0402]  44.5 20.49 270 bottom
R148  147K  [R0402]  63.6 38.9 270 top
R149  47K  [R0402]  64.85 38.9 270 top
R156  10K  [R0402]  59.8 37.91 90 bottom
R157  10K  [R0402]  63 38.9 270 bottom
TP1  TEST POINT  [SCREW-3D5-2D5]  2.5 45.5 0 top
TP2  TEST POINT  [SCREW-3D5-2D5]  2.5 2.5 0 top
TP3  TEST POINT  [SCREW-3D5-2D5]  65.5 45.5 0 top
TP4  TEST POINT  [SCREW-3D5-2D5]  65.5 2.5 0 top
TP5  T POINT A  [TP_SMD_CIR_2D0]  32.2 3.8 180 bottom
TP6  T POINT A  [TP_SMD_CIR_2D0]  35.7 3.8 180 bottom
U1  SGM58031XMS10G/TR  [MSOP-10]  15 22.7 180 top
U2  SGM8968-4XS14G/TR  [SOIC-14]  4.3 21.4 90 top
U3  SGM6230  [SOIC-8-EPAD]  59.1 21.1 90 top
U4  SGM2028-3.3  [SOT-23-5]  53.8 37.1 0 top
U5  SGM2028-ADJ  [SOT-23-5]  51.6 31.6 90 top
U6  GD32F303RGT6  [LQFP64]  39.9 26.5 90 top
U7  AS4950  [SOP8-PP]  8.3 7.8 180 top
U8  SGM8968-4XS14G/TR  [SOIC-14]  20.3 26.1 0 top
U9  AS4950  [SOP8-PP]  30.5 7.8 180 top
U10  GD25Q40ETIG  [SOP8-150MIL]  41.7 28 180 bottom
U11  UN3490E  [SO-8]  44.1 35.7 90 top
U12  SM712  [SOT-23-3]  48.6 44.8 180 bottom
U13  SM712  [SOT-23-3]  45 44.8 180 bottom
U14  SGM7SZ14  [SOT-23-5]  24.3 31.5 0 bottom
U15  SGM7SZ14  [SOT-23-5]  29 31.5 180 top
U16  SGM7SZ14  [SOT-23-5]  24.3 31.5 180 top
U17  SGM7SZ14  [SOT-23-5]  19.6 31.5 180 top
U18  SGM8968-2  [SOIC-8]  8.7 34.9 270 top
U19  CJ431  [SOT-23-3]  3.2 33.7 0 top
U20  CJ431  [SOT-23-3]  14.2 33.7 0 top
U21  SGM2028-3.3  [SOT-23-5]  38.9 42.7 0 bottom
U22  SGM7SZ14  [SOT-23-5]  38.9 42.7 180 top
U23  SGM7SZ14  [SOT-23-5]  38.9 37.1 0 bottom
U24  SGM7SZ14  [SOT-23-5]  38.9 37.1 180 top
U25  SGM7SZ14  [SOT-23-5]  19.6 37.1 180 top
U26  SGM7SZ14  [SOT-23-5]  19.6 37.1 0 bottom
U27  SGM7SZ14  [SOT-23-5]  24.3 37.1 180 top
U28  SGM7SZ14  [SOT-23-5]  24.3 37.1 0 bottom
U29  SGM7SZ14  [SOT-23-5]  29 37.1 180 top
U30  SGM7SZ14  [SOT-23-5]  29 37.1 0 bottom
U31  SGM7SZ14  [SOT-23-5]  33.7 37.1 180 top
U32  SGM7SZ14  [SOT-23-5]  33.7 37.1 0 bottom
U33  SGM6230  [SOIC-8-EPAD]  45.7 7.5 180 top
U38  SGM7SZ08YXDM6G/TR  [XTDFN-1X1-6L]  20 30.9 180 bottom
U39  SGM7SZ08YXDM6G/TR  [XTDFN-1X1-6L]  20.3 32.3 0 bottom
U40  SGM7SZ08YXDM6G/TR  [XTDFN-1X1-6L]  29.3 30.9 180 bottom
U41  SGM7SZ08YXDM6G/TR  [XTDFN-1X1-6L]  29.7 32.3 0 bottom
U42  SGM7SZ08YXDM6G/TR  [XTDFN-1X1-6L]  54.6 36.5 180 bottom
U43  SGM7SZ08YXDM6G/TR  [XTDFN-1X1-6L]  54.5 37.9 0 bottom
U44  SGM7SZ08YXDM6G/TR  [XTDFN-1X1-6L]  50 38 180 bottom
U45  SGM7SZ08YXDM6G/TR  [XTDFN-1X1-6L]  47.4 37.3 0 bottom
U46  SGM2028-ADJ  [SOT-23-5]  61.3 37.2 0 top
Y2  32.768KHz  [CRY-SMD-3D2X1D5MM-2P]  51.3 22.1 270 top
Y3  8MHz  [CRY-SMD-3D2X2D5MM-4P]  50.8 24.7 90 top

## Library data of the parts
BT1 = BATTERY
C1-C71 C73-C91 C95 C100-C114 = CAP NP
D1 D3 D41 D43 = DIODE ZENER_0
D2 D4 D5 = LED
D25-D39 D46 D50-D62 = DIODE TS BI-DIR
J3 J7 J9 J13 = Header1x4_0
J4 = Header1x16_0
J8 J11 J12 J14 = Header1x6_0
L1-L4 = INDUCTOR
L6 = BEAD
Q1 Q5 Q6 = 2N2800
Q4 = NCE55P05S_1
Q7 = BAT54CW_0
R1-R24 R26-R34 R37-R75 R78-R110 R112-R135 R144-R149 R156 R157 = R
TP1-TP4 = TEST POINT
TP5 TP6 = T POINT A
U1 = SGM58031
U2 U8 = SGM8968-4
U3 U33 = SGM6230
U4 U5 U21 U46 = SGM2028
U6 = GD32F303RE
U7 U9 = AS4950
U10 = GD25Q40E
U11 = UN3490E
U12 U13 = SM712
U14-U17 U22-U32 = SGM7SZ14
U18 = SGM8968-2
U19 U20 = CJ431_0
U38-U45 = SGM7SZ08YXDM6G/TR
Y2 = CRYSTAL
Y3 = CRYSTAL_1

## Footprints (pads in the part's own frame, mm; a bottom-side part is the same pattern mirrored in y, then rotated)
C0402
  rect 0.6x0.5 smd: 1(0.01,0.25) 2(0.97,0.25)
C0603
  rect 0.4x0.8 smd: 1(0.1,0.4) 2(1.5,0.4)
C0805
  rect 0.7x1 smd: 1(0.2,0.62) 2(1.8,0.62)
C1210
  rect 1.2x2.5 smd: 1(0,0) 2(2.8,0)
C2220
  rect 1x5 smd: 1(0,0) 2(5.2,0)
CRY-SMD-3D2X1D5MM-2P
  rect 1.1x1.9 smd: 1(0,0) 2(2.5,0)
CRY-SMD-3D2X2D5MM-4P
  rect 1.3x1.1 smd: 1(0,-1.8) 2(2.3,-1.8) 3(2.3,0) 4(0,0)
DFN-1006DN
  rect 0.2x0.5 smd: 1(0,0) 2(0.65,0)
DO-214AC
  rect 1.8x2.1 smd: 1(0.13,1.4) 2(4.53,1.4)
FB0402
  rect 0.5x0.5 smd: 1(0.05,0.24) 2(0.95,0.24)
IND-5D7X5D2X1D8
  rect 2x3 smd: 1(0,0) 2(4.2,0)
L1206
  rect 0.8x1.8 smd: 1(0,0) 2(2.5,0)
LED0402
  rect 0.4x0.6 smd: 1(-0.1,0.25) 2(1.1,0.25)
LQFP64
  rect 0.2x0.75 smd: 1(-3.75,-5.6) 2(-3.25,-5.6) 3(-2.75,-5.6) 4(-2.25,-5.6) 5(-1.75,-5.6) 6(-1.25,-5.6) 7(-0.75,-5.6) 8(-0.25,-5.6) 9(0.25,-5.6) 10(0.75,-5.6) 11(1.25,-5.6) 12(1.75,-5.6) 13(2.25,-5.6) 14(2.75,-5.6) 15(3.25,-5.6) 16(3.75,-5.6) 33(3.75,5.6) 34(3.25,5.6) 35(2.75,5.6) 36(2.25,5.6) 37(1.75,5.6) 38(1.25,5.6) 39(0.75,5.6) 40(0.25,5.6) 41(-0.25,5.6) 42(-0.75,5.6) 43(-1.25,5.6) 44(-1.75,5.6) 45(-2.25,5.6) 46(-2.75,5.6) 47(-3.25,5.6) 48(-3.75,5.6)
  rect 0.75x0.2 smd: 17(5.6,-3.75) 18(5.6,-3.25) 19(5.6,-2.75) 20(5.6,-2.25) 21(5.6,-1.75) 22(5.6,-1.25) 23(5.6,-0.75) 24(5.6,-0.25) 25(5.6,0.25) 26(5.6,0.75) 27(5.6,1.25) 28(5.6,1.75) 29(5.6,2.25) 30(5.6,2.75) 31(5.6,3.25) 32(5.6,3.75) 49(-5.6,3.75) 50(-5.6,3.25) 51(-5.6,2.75) 52(-5.6,2.25) 53(-5.6,1.75) 54(-5.6,1.25) 55(-5.6,0.75) 56(-5.6,0.25) 57(-5.6,-0.25) 58(-5.6,-0.75) 59(-5.6,-1.25) 60(-5.6,-1.75) 61(-5.6,-2.25) 62(-5.6,-2.75) 63(-5.6,-3.25) 64(-5.6,-3.75)
MSOP-10
  rect 0.3x1 smd: 1(0,-5) 2(0.5,-5) 3(1,-5) 4(1.5,-5) 5(2,-5) 6(2,0) 7(1.5,0) 8(1,0) 9(0.5,0) 10(0,0)
R0402
  rect 0.6x0.5 smd: 1(0.01,0.25) 2(0.97,0.25)
R0603
  rect 0.4x0.8 smd: 1(0.1,0.4) 2(1.5,0.4)
R2010
  rect 1.7x3.15 smd: 1(0,0) 2(6,0)
SCREW-3D5-2D5
  round 3.5 hole 2.5: 1(0,0)
SMD-PH2D0-4P-HOR
  rect 1x3.5 smd: 1(-3,1.9) 2(-1,1.9) 3(1,1.9) 4(3,1.9)
  rect 1.5x3.5 smd: 5(5.5,-3.8) 6(-5.5,-3.8)
SMD-SH1D0-4P-HOR
  rect 0.5x1.2 smd: 1(-1.5,0.74) 2(-0.5,0.74) 3(0.5,0.74) 4(1.5,0.74)
  rect 0.8x1.8 smd: 5(2.8,-3.3) 6(-2.8,-3.3)
SMD-SH1D0-6P-HOR
  rect 0.5x1.2 smd: 1(-2.5,0.7) 2(-1.5,0.7) 3(-0.5,0.7) 4(0.5,0.7) 5(1.5,0.7) 6(2.5,0.7)
  rect 0.8x1.8 smd: 7(3.8,-3.3) 8(-3.8,-3.3)
SMD-SH1D0-16P-HOR
  rect 0.5x1.2 smd: 1(-7.5,0.7) 2(-6.5,0.7) 3(-5.5,0.7) 4(-4.5,0.7) 5(-3.5,0.7) 6(-2.5,0.7) 7(-1.5,0.7) 8(-0.5,0.7) 9(0.5,0.7) 10(1.5,0.7) 11(2.5,0.7) 12(3.5,0.7) 13(4.5,0.7) 14(5.5,0.7) 15(6.5,0.7) 16(7.5,0.7)
  rect 0.8x1.8 smd: 17(8.8,-3.3) 18(-8.8,-3.3)
SO-8
  rect 0.65x1.35 smd: 1(0,-5.4) 2(1.27,-5.4) 3(2.54,-5.4) 4(3.81,-5.4) 5(3.81,0) 6(2.54,0) 7(1.27,0) 8(0,0)
SOD-123
  rect 0.6x0.5 smd: 1(0,0) 2(3.1,0)
SOIC-8
  rect 0.5x1 smd: 1(-1.89,-2.56) 2(-0.62,-2.56) 3(0.65,-2.56) 4(1.92,-2.56) 5(1.92,2.54) 6(0.65,2.54) 7(-0.62,2.54) 8(-1.89,2.54)
SOIC-8-EPAD
  rect 0.61x1.91 smd: 1(0,-5.6) 2(1.27,-5.6) 3(2.54,-5.6) 4(3.81,-5.6) 5(3.81,0) 6(2.54,0) 7(1.27,0) 8(0,0)
  rect 3x2 smd: 9(1.85,-2.8)
SOIC-14
  rect 0.6x2.2 smd: 1(0,-5.4) 2(1.27,-5.4) 3(2.54,-5.4) 4(3.81,-5.4) 5(5.08,-5.4) 6(6.35,-5.4) 7(7.62,-5.4) 8(7.62,0) 9(6.35,0) 10(5.08,0) 11(3.81,0) 12(2.54,0) 13(1.27,0) 14(0,0)
SOP8-150MIL
  rect 0.5x0.9 smd: 1(0,-5.1) 2(1.27,-5.1) 3(2.54,-5.1) 4(3.81,-5.1) 5(3.81,0) 6(2.54,0) 7(1.27,0) 8(0,0)
SOP8-PP
  rect 0.45x1.2 smd: 1(0,-5) 2(1.27,-5) 3(2.54,-5) 4(3.81,-5) 5(3.81,0) 6(2.54,0) 7(1.27,0) 8(0,0)
  rect 3x2 smd: 9(1.9,-2.5)
SOP-8
  rect 0.45x1.2 smd: 1(0,-5) 2(1.27,-5) 3(2.54,-5) 4(3.81,-5) 5(3.81,0) 6(2.54,0) 7(1.27,0) 8(0,0)
SOT-23-3
  rect 0.8x0.8 smd: 1(-0.95,-1.4) 2(0.95,-1.4) 3(0,1.4)
SOT-23-5
  rect 0.5x0.8 smd: 1(-0.95,-1.45) 2(0,-1.45) 3(0.95,-1.45) 4(0.96,1.45) 5(-0.94,1.45)
SOT-323
  rect 0.8x0.8 smd: 1(-0.95,-1.4) 2(0.95,-1.4) 3(0,1.4)
TP_SMD_CIR_2D0
  round 2 smd: 1(0,0)
XTDFN-1X1-6L
  rect 0.2x0.53 smd: 1(0,-0.75) 2(0.35,-0.75) 3(0.7,-0.75) 4(0.7,0) 5(0.35,0) 6(0,0)

## Nets
GND: BT1.2(-) C1.1 C2.1 C3.1 C4.1 C5.1 C6.1 C7.1 C8.2 C9.1 C10.1 C13.1 C14.1 C15.1 C16.1 C17.1 C18.1 C19.1 C20.1 C21.1 C22.2 C23.2 C24.2 C25.2 C26.1 C27.1 C28.1 C29.2 C30.1 C31.1 C32.1 C33.1 C34.1 C35.1 C36.1 C37.2 C38.1 C39.1 C40.2 C41.2 C42.2 C43.2 C44.2 C45.1 C46.1 C47.1 C48.1 C49.1 C50.1 C51.1 C52.1 C53.1 C54.2 C55.2 C56.1 C57.1 C58.2 C59.2 C60.1 C61.1 C62.2 C63.2 C64.2 C65.1 C66.1 C67.1 C68.2 C69.2 C70.2 C71.2 C73.1 C74.1 C75.1 C76.1 C79.1 C80.2 C81.1 C82.1 C83.1 C84.1 C85.1 C86.1 C87.1 C88.1 C89.1 C90.1 C91.1 C95.1 C100.2 C101.1 C102.2 C103.1 C104.2 C105.1 C106.2 C107.1 C108.1 C109.1 C110.2 C111.2 C112.2 C113.2 C114.2 D1.2 D3.2 D25.1 D26.1 D27.1 D28.1 D29.1 D30.1 D31.1 D32.1 D33.1 D34.1 D35.1 D36.1 D37.1 D38.1 D39.1 D41.2 D46.1 D50.1 D51.1 D52.1 D53.1 D54.1 D55.1 D56.1 D57.1 D58.1 D59.1 D60.1 D61.2 D62.2 J3.2 J3.5 J3.6 J4.16 J4.17 J4.18 J7.5 J7.6 J8.2 J8.4 J8.7 J8.8 J9.1 J9.2 J9.5 J9.6 J11.3 J11.4 J11.7 J11.8 J12.3 J12.4 J12.7 J12.8 J13.5 J13.6 J14.5 J14.7 J14.8 R2.1 R7.1 R11.1 R14.1 R18.1 R24.1 R26.1 R28.1 R31.1 R32.1 R39.2 R40.1 R43.1 R46.1 R50.2 R52.2 R56.1 R57.1 R59.1 R62.2 R65.2 R70.2 R79.1 R81.1 R118.1 R119.2 R121.1 R123.1 R124.2 R125.2 R127.1 R129.2 R130.2 R135.1 R146.1 R147.1 R149.1 TP1.1 TP2.1 TP3.1 TP4.1 TP5.1(TP) U1.1 U1.3 U2.11 U3.4 U3.9 U4.2 U5.2 U6.12 U6.18(VSS_4) U6.31 U6.47 U6.63 U7.1 U7.9 U8.11 U9.1 U9.9 U10.4 U11.4 U12.3 U13.3 U14.3 U15.3 U16.3 U17.3 U18.4 U19.3 U20.3 U21.2 U22.3 U23.3 U24.3 U25.3 U26.3 U27.3 U28.3 U29.3 U30.3 U31.3 U32.3 U33.4 U33.9 U38.3 U39.3 U40.3 U41.3 U42.3 U43.3 U44.3 U45.3 U46.2 Y3.2 Y3.4
VBAT: D43.1(CATHODE) J9.3 J9.4 Q1.1(EMITTER) Q4.1 Q4.2 Q4.3(S.3) R22.2
VDD5: C1.2 C18.2 C29.1 C48.2 C83.2 C84.2 C85.2 C86.2 R33.1 R91.1 R93.1 R97.1 R98.1 R122.2 U2.4 U5.5(OUT) U8.4 U18.8
VDD5_DISP: C109.2 J11.1 J11.2 R148.1 U46.5(OUT)
VDD12: C79.2 L2.2 L3.1 L4.1 R117.1
VDD12_LDM: L4.2 TP6.1(TP)
VDD12_MOTOR: C26.2 C31.2 C111.1 C112.1 C113.1 C114.1 L3.2 R69.1 U7.5 U9.5
VDD33: C7.2 C15.2 C37.1 C40.1 C41.1 C42.1 C43.1 C44.1 C54.1 C55.1 C58.1 C59.1 C62.1 C63.1 C64.1 C68.1 C69.1 C70.1 C71.1 C95.2 C100.1 C101.2 C102.1 C103.2 C104.1 C105.2 C106.1 J12.5 J12.6 J14.6 L6.1 Q7.1 R17.2 R19.2 R20.2 R21.2 R34.2 R37.2 R38.2 R45.2 R58.2 R72.2 R82.2 R83.2 R88.2 R89.2 R104.2 R105.2 R106.2 R107.2 R108.2 R109.2 R110.2 R112.2 R113.2 R114.2 R115.2 R126.1 R128.2 R144.2 R145.2 R156.2 R157.2 U1.8(VDD) U4.5(OUT) U6.19 U6.32 U6.48 U6.64 U10.3(WP#(IO2)) U10.7 U10.8 U11.1 U14.5 U15.5 U16.5 U17.5 U22.5 U23.5 U24.5 U25.5 U26.5 U27.5 U28.5 U29.5 U30.5 U31.5 U32.5 U38.1 U38.6 U39.1 U39.6 U40.1 U40.6 U41.1 U41.6 U42.1 U42.6 U43.1 U43.6 U44.1 U44.6 U45.1 U45.6
VDD33_WIFI: C50.2 J3.1 U21.5(OUT)
VDD33A: C90.2 C91.2 L6.2 U6.13
VDD55: C13.2 C14.2 C16.2 C19.2 C20.2 C51.2 C52.2 C107.2 C108.2 L1.2 R29.1 U4.1 U4.3 U5.1 U5.3 U21.1 U21.3 U46.1 U46.3
ADC012_IN10: C87.2 R133.1 U6.11
ADC012_IN11: C35.2 R67.1 U6.10
ADC012_IN12: C30.2 R51.1 U6.9
ADC012_IN13: C34.2 R64.1 U6.8
ADC_RDY: R21.1 U1.2 U6.45
ADC_VR1: R78.2 R94.2
ADC_VR2: R80.2 R103.2
BOOT0: R145.1 R147.2 U6.60
BOOT1: R144.1 R146.2 U6.28
CON_FLASH: U6.56 U23.4(Y)
DAC_OUT0: R47.2 U6.21
DAC_OUT1: R60.2 U6.20
DAY_NIGHT: U6.15 U22.4(Y)
DOWN_SW: U6.25 U27.4(Y)
FL_ADD: U6.41 U16.4(Y)
FL_SUB: U6.44 U17.4(Y)
I2C0_SCL: R19.1 U1.10 U6.61
I2C0_SDA: R20.1 U1.9 U6.62
IO_CON_FLASH: C57.2 D26.2 J4.3 R104.1 U23.2
IO_DAY_NIGHT: C56.2 D25.2 J4.2 R105.1 U22.2
IO_DOWN: C66.2 D30.2 J4.12 R107.1 U27.2
IO_FL_ADD: C45.2 D36.2 J4.10 R89.1 U16.2
IO_FL_SUB: C46.2 D37.2 J4.11 R88.1 U17.2
IO_LASER_MODE1: C73.2 D35.2 J4.8 R112.1 U32.2
IO_LASER_MODE2: C74.2 D34.2 J4.9 R113.1 U31.2
IO_LASER_MODE3: C75.2 D33.2 J4.6 R114.1 U30.2
IO_LASER_MODE4: C76.2 D32.2 J4.7 R115.1 U29.2
IO_LEFT: C65.2 D29.2 J4.14 R108.1 U26.2
IO_M1_OUT1: J7.2 U7.6
IO_M1_OUT2: J7.1 U7.8
IO_M2_OUT1: J7.4 U9.6
IO_M2_OUT2: J7.3 U9.8
IO_RIGHT: C60.2 D28.2 J4.15 R109.1 U25.2
IO_RS422_RX+: J13.1 R84.2 R126.2 U11.8 U12.1
IO_RS422_RX-: J13.2 R84.1 R127.2 U11.7 U12.2
IO_RS422_TX+: J13.4 R85.1 R128.1 U11.5 U13.2
IO_RS422_TX-: J13.3 R85.2 R129.1 U11.6(Z) U13.1
IO_SET: C61.2 D27.2 J4.1 R110.1 U24.2
IO_SHOT_SW1: C39.2 D38.2 J4.4 R83.1 U14.2
IO_SHOT_SW2: C38.2 D39.2 J4.5 R82.1 U15.2
IO_UART3_RX: D52.2 J3.4 U41.2
IO_UART3_TX: D51.2 J3.3 U40.4(Y)
IO_UART4_RX: D50.2 J12.2 U39.2
IO_UART4_TX: D46.2 J12.1 U38.4(Y)
IO_UP: C67.2 D31.2 J4.13 R106.1 U28.2
IO_USART0_RX: D56.2 J14.2 U45.2
IO_USART0_TX: D55.2 J14.1 U44.4(Y)
IO_USART2_RX: D54.2 J11.5 U43.2
IO_USART2_TX: D53.2 J11.6 U42.4(Y)
IO_VR1: J8.6 Q5.3 R95.2
IO_VR1_MID: J8.5 R94.1
IO_VR2: J8.1 Q6.3 R102.2
IO_VR2_MID: J8.3 R103.1
LASER_MODE1: U6.22 U32.4(Y)
LASER_MODE2: U6.2 U31.4(Y)
LASER_MODE3: U6.23 U30.4(Y)
LASER_MODE4: U6.14 U29.4(Y)
LED1: D4.1(CATHODE) U6.55
LED2: D5.1(CATHODE) U6.50
LEFT_SW: U6.26 U26.4(Y)
M1_PWM1: R39.1 R41.1 U7.3
M1_PWM2: R40.2 R42.1 U7.2
M2_PWM1: R52.1 R53.1 U9.3
M2_PWM2: R54.1 R56.2 U9.2
NRST: C21.2 R34.1 U6.7
OSC32IN: C24.1 U6.3 Y2.2
OSC32OUT: C25.1 U6.4 Y2.1
OSC_IN: C22.1 R71.2 U6.5 Y3.1
OSC_OUT: C23.1 R71.1 U6.6 Y3.3
RIGHT_SW: U6.27 U25.4(Y)
SET_SW: U6.57 U24.4(Y)
SHOT_SW1: U6.40 U14.4(Y)
SHOT_SW2: U6.39 U15.4(Y)
SPI1_MISO: R75.2 U6.35
SPI1_MOSI: R74.2 U6.36
SPI1_NSS: R72.1 U6.33 U10.1
SPI1_SCK: R73.2 U6.34
SWCLK: D61.1 J14.4 R156.1 U6.49
SWDIO: D62.1 J14.3 R157.1 U6.46
TIMER3_CH0: R53.2 U6.58
TIMER3_CH1: R54.2 U6.59
TIMER7_CH0: R42.2 U6.37
TIMER7_CH1: R41.2 U6.38
UART3_RX: U6.52 U41.4(Y)
UART3_TX: U6.51 U40.2
UART4_RX: U6.54 U39.4(Y)
UART4_TX: U6.53 U38.2
UP_SW: U6.24 U28.4(Y)
USART0_RX: U6.43 U45.4(Y)
USART0_TX: U6.42 U44.2
USART1_RX: R86.2 U6.17
USART1_TX: R87.2 U6.16
USART2_RX: U6.30 U43.4(Y)
USART2_TX: U6.29 U42.2
VISEN-1: R43.2 R44.2 U7.7
VISEN-2: R55.2 R57.2 U9.7
VSYS: C8.1 C9.2 C81.2 C110.1 Q4.5 Q4.6 Q4.7 Q4.8 R30.2 R120.2 R134.2 U3.2 U33.2
N00539: R1.2 R4.1 U2.1
N00551: R1.1 R2.2 U2.2
N00622: R3.2 U2.3
N00721: R5.1 R7.2 U2.6
N00759: R5.2 R6.1 U2.7
N00847: R8.2 U2.5
N00921: R9.2 R10.1 U2.8
N00944: R9.1 R11.2 U2.9
N01017: R12.2 U2.10
N01109: R13.1 R14.2 U2.13
N01128: R13.2 R15.1 U2.14(OUTD)
N01207: R16.2 U2.12
N01411: C2.2 R4.2 U1.6
N01460: C3.2 R6.2 U1.4
N01493: C4.2 R10.2 R125.1 U1.5
N01526: C5.2 R15.2 R124.1 U1.7
N01776: C6.2 D59.2 R3.1 R17.1 R18.2
N03561: Q1.2 R23.1
N03591: D43.2 Q1.3 Q4.4 R24.2
N06057: D1.1(CATHODE) D2.1(CATHODE) R23.2
N06093: D2.2 R22.1
N06851: C10.2 U3.8
N07166: C11.2 U3.6
N07246: C11.1 R26.2
N07633: R27.2 U3.1
N07673: C12.2 R27.1
N07683: C12.1 D3.1(CATHODE) L1.1 U3.3(SW)
N07804: R28.2 R29.2 U3.5
N09307: R30.1 R31.2 U3.7
N12869: C17.2 U4.4
N14431: R32.2 R33.2 U5.4
N17341: D4.2 R38.1
N17345: D5.2 R37.1
N18762: C27.2 R44.1 R48.2
N19455: C28.2 R45.1 R46.2 R47.1 U7.4(VREF)
N20561: R48.1 U8.3
N20617: R49.1 R51.2 U8.1
N20677: R49.2 R50.1 U8.2
N22109: C33.2 R58.1 R59.2 R60.1 U9.4(VREF)
N22131: C32.2 R55.1 R61.2
N22913: R61.1 U8.5
N22945: R62.1 R63.2 U8.6
N23125: R63.1 R64.2 U8.7
N24146: R65.1 R66.2 U8.9
N24163: R66.1 R67.2 U8.8
N24605: R68.1 U8.10
N25623: C36.2 D57.2 R68.2 R134.1 R135.2
N31147: R73.1 U10.6
N31177: R74.1 U10.5
N31207: R75.1 U10.2
N33225: R12.1 R78.1 R79.2
N33519: R16.1 R80.1 R81.2
N39002: R86.1 U11.2
N39012: R87.1 U11.3
N55400: R90.2 U18.2
N55475: R92.2 R95.1 R96.2 U18.1
N55882: C47.2 U18.3 U19.1(REF)
N57140: R93.2 U19.2
N57821: Q5.1(EMITTER) R90.1 R91.2 R96.1
N58361: R97.2 U20.2
N58395: C49.2 U18.5 U20.1(REF)
N59140: Q6.1(EMITTER) R98.2 R99.1 R100.1
N59210: R100.2 R101.2 R102.1 U18.7(OUTB)
N59412: R99.2 U18.6
N554432: Q5.2 R92.1
N591840: Q6.2 R101.1
N9259533: C53.2 U21.4
N9286753: R116.2 U33.1
N9286760: C78.2 R116.1
N9286764: C78.1 D41.1(CATHODE) L2.1 U33.3(SW)
N9286887: R117.2 R118.2 U33.5
N9288776: C77.1 U33.6
N9288809: C77.2 R119.1
N9289767: C80.1 U33.8
N9291868: R120.1 R121.2 U33.7
N9293118: C82.2 D60.2 R8.1 R122.1 R123.2
N9307028: C88.2 D58.2 R69.2 R70.1 R132.2
N9307589: R130.1 R131.2 U8.13
N9307633: R131.1 R133.2 U8.14(OUTD)
N9307956: R132.1 U8.12
N9315409: C89.2 Q7.3 U6.1
N9316428: BT1.1 Q7.2
N9336743: R148.2 R149.2 U46.4

Pads without a net: U14 1; U15 1; U16 1; U17 1; U22 1; U23 1; U24 1; U25 1; U26 1; U27 1; U28 1; U29 1; U30 1; U31 1; U32 1; U38 5; U39 5; U40 5; U41 5; U42 5; U43 5; U44 5; U45 5

## Via types
v1: diameter 0.4, hole 0.2, TOP to BOTTOM, 523 vias
v2: diameter 0.3, hole 0.15, TOP to BOTTOM, 95 vias
v3: diameter 0.8, hole 0.5, TOP to BOTTOM, 28 vias

## Routing (per net, layer and track width the routed paths; a pad name or vN(x,y) marks a point on that pad's centre or on a via; arc(x,y) is an arc through that point)
GND: length 261.5
  TOP w0.16: v1(35.3,23) 35.05,23.25 U6.47
  TOP w0.2: C68.2 31.83,36.47 32.1,36.74 32.1,37.38 32.32,37.6 v1(32.75,37.6) ; U4.2 53.8,35.02 53.55,34.77 53.55,34.15 54.1,33.6 v1(54.6,33.6) ; C46.1 v1(21.95,33.8) 21.5,34.25 D37.1 ; D28.1 21.45,39.9 v1(21.95,39.4) ; C38.1 v1(31.35,33.8) 30.9,34.25 D39.1 ; C45.1 v1(26.65,33.8) 26.2,34.25 D36.1 ; 42.5,45.09 42.5,45.92 ; 42.5,45.09 v1(42.5,46.4) ; 42.5,45.09 42.3,44.89 41.44,44.89 41.25,44.7 C56.1 ; v1(26.65,39.4) 26.15,39.9 D30.1 ; D32.1 30.85,39.9 v1(31.35,39.4) 31.85,39.9 D34.1 ; U6.18 43.15,33.25 v1(42.8,33.6) ; C58.2 41.96,36.47 42.16,36.67 42.16,38.43 41.85,38.74 41.25,38.74 ; v1(46.28,28.25) U6.12 ; C70.2 36.57,36.47 37,36.9 37,37.4 37.2,37.6 v1(37.95,37.6) ; U15.3 v1(28.05,32.15) 28.05,31.35 27.57,30.87 C43.2 ; C44.2 22.45,30.87 23.35,31.77 v1(23.35,32.2) U16.3 ; v1(41.99,42.09) 41.97,42.07 C54.2 ; v1(28.05,37.6) 27.6,37.6 27.4,37.4 27.4,36.74 27.13,36.47 C63.2 ; U6.31 36.65,32.85 v1(36.5,33) ; C59.2 22.43,36.47 22.7,36.74 22.7,37.4 22.9,37.6 v1(23.35,37.6) ; v1(43.4,20) 43.15,20.25 U6.63 ; U17.3 v1(18.65,32.15) ; v1(36.05,39.4) 36.6,39.4 37.1,39.9 D27.1 ; C3.1 v1(14.25,31.3)
  TOP w0.26: v1(46.28,28.25) 46.88,28.85 C21.1
  TOP w0.3: U2.11 v1(5.73,25.21) ; R149.1 v1(65.1,39.6) ; U11.4 48.61,39.51 v1(48.6,39.5) ; C40.2 56.6,39.95 v1(56.65,39.9) ; v1(13.05,35.2) 13.43,35.2 13.53,35.1 U20.3 ; C42.2 v1(32.08,30.87) ; C80.2 v1(46.4,2.9) ; R121.1 v1(50.2,14) ; v1(50.95,39.95) C15.1 ; R39.2 5.04,15.67 5.03,15.68 C28.1 v1(4.55,16.5) ; R70.2 v1(32.73,16.57) ; v1(26.55,16.6) C33.1 27.03,15.68 27.04,15.67 R52.2 ; v1(23.75,27.7) 24.11,27.34 U8.11 ; U1.1 v1(15,26.87) ; R40.1 v1(7.55,16.5) ; U1.3 v1(14,26.87) ; U22.3 v1(37.95,43.2) ; v1(45.1,5.43) R119.2 ; R56.1 v1(30.55,16.6) ; R118.1 v1(42.5,2.9)
  TOP w0.38: v1(4.3,35.3) 3.8,35.3 3.6,35.1 U19.3 ; C19.1 v1(54.6,33.6) ; C17.1 57.1,37.92 57.32,37.7 C109.1 58.4,37.7 v1(58.7,37.4) ; v1(65.94,36.81) C107.1 64.52,36.81 64.3,36.59 C108.1 ; J11.4 v1(55.8,44.4) ; v1(52.6,28.26) Y3.2 ; C24.2 v1(49.33,19.23) ; C76.1 v1(31.35,39.4) ; C25.2 v1(49.33,22.47) ; C16.1 57.1,36.59 57.32,36.81 C14.1 v1(58.69,36.81) ; C60.1 v1(21.95,39.4) ; v1(41.25,39.4) C61.1 ; U24.3 v1(37.95,37.6) ; v1(49.7,25.2) 50,25.2 50.5,24.7 Y3.4 ; v1(47.5,24.15) C22.2 ; C48.1 v1(7.1,39.49) ; v1(13.2,19.1) 13.2,19.4 13.25,19.45 C7.1 ; v1(12.15,19.1) 12.15,19.35 12.25,19.45 C2.1 ; U18.4 v1(6.88,32.98) ; C31.1 v1(32.72,9.93) ; C66.1 v1(26.65,39.4) ; U29.3 v1(28.05,37.6) ; U31.3 v1(32.75,37.6) ; C23.2 v1(47.5,27.45) ; U25.3 v1(18.65,37.6) ; J11.3 v1(56.8,44.4) ; U5.2 v1(52.3,31.6) ; R26.1 v1(57.5,23) ; C20.1 v1(54.6,28.9) ; U27.3 v1(23.35,37.6) ; C74.1 v1(36.05,39.4)
  TOP w0.4: J8.2 v1(12.8,42.7) ; U9.1 v1(30.5,11.87) ; J8.4 v1(10.8,42.7) ; U33.4 v1(41.89,11.82) ; U7.1 v1(8.3,11.87)
  TOP w0.5: U3.4 v1(63.09,24.91)
  BOTTOM w0.12: C102.2 30.92,33.07 30.9,33.05 U41.3 ; U38.3 18.98,30.15 18.73,30.4 D46.1 ; U40.3 28.38,30.15 28.13,30.4 D51.1 27.27,30.4 27.2,30.47 27.2,30.75 27.08,30.87 C43.2
  BOTTOM w0.16: v1(48.6,39.5) 48.6,39 48.1,38.5 U45.3 48.6,38.05 48.7,37.95 48.7,37.35 48.8,37.25 U44.3 ; U43.3 55.65,38.65 55.9,38.9 56.21,38.9 56.22,38.89 C103.1
  BOTTOM w0.2: C95.1 21.95,29.86 22.34,29.47 v1(22.59,29.47) ; D62.2 65.43,38.05 65.94,37.54 v1(65.94,36.81) ; D26.1 36.5,39.85 v1(36.05,39.4) ; v1(31.35,33.8) 30.85,34.3 D52.1 ; v1(32.73,16.57) 32.73,16.19 32.7,16.16 D58.1 ; C63.2 27.27,36.47 27.4,36.6 27.4,37.4 27.6,37.6 v1(28.05,37.6) ; C105.1 51.05,36.45 51.5,36 D53.1 ; v1(37.95,37.6) 37.3,37.6 37.1,37.4 37.1,36.8 36.77,36.47 C70.2 ; C59.2 22.57,36.47 22.7,36.6 22.7,37.4 22.9,37.6 v1(23.35,37.6) ; D56.1 v1(48.6,39.5) D55.1 ; R146.1 36.85,34.05 36.5,33.7 v1(36.5,33) ; D33.1 30.9,39.85 v1(31.35,39.4) 31.8,39.85 D35.1 ; C43.2 26.25,30.87 25.97,31.15 v1(25.71,31.15) ; D54.1 v1(56.65,39.9) ; U42.3 53.43,35.75 53.18,36 D53.1 ; v1(43.4,20) 43.4,20.16 43.72,20.48 R147.1 ; D46.1 17.72,30.4 17.12,29.8 17.12,27.38 17.71,26.79 C87.1 v1(18.25,27.5) ; D53.1 52.7,33.6 ; D61.2 61.1,39.2 v1(61.2,39.3) ; C101.1 31.85,29.91 32.08,30.14 v1(32.08,30.87) ; D60.1 v1(13.2,31.3) ; D59.1 v1(13.2,19.1) ; D29.1 21.5,39.85 v1(21.95,39.4) C60.1 21.47,38.69 21.33,38.55 U26.3 ; U14.3 26.08,32.95 26.22,33.09 C39.1 ; D38.1 26.15,34.3 v1(26.65,33.8) ; v1(35.3,23) 35.3,21.1 34.73,20.53 C37.2 ; v1(32.75,37.6) 32.3,37.6 32.1,37.4 32.1,36.7 31.87,36.47 C68.2 ; D50.1 21.45,34.3 v1(21.95,33.8) C100.2 21.52,33.07 21.5,33.05 U39.3 ; U28.3 26.08,38.55 26.22,38.69 C66.1 v1(26.65,39.4) 26.2,39.85 D31.1
  BOTTOM w0.26: C104.2 57.49,35.63 57.8,35.94 57.8,36.52 58.09,36.81 v1(58.69,36.81)
  BOTTOM w0.3: U23.3 40.68,38.55 40.82,38.69 C61.1 ; R62.2 v1(26.65,19) ; v1(4.3,35.3) 3.7,35.9 2.7,35.9 2.2,36.4 C83.1 ; R130.2 v1(21.45,27.7) ; C30.1 v1(18.25,19.5) ; v1(8.3,28.2) 8.55,27.95 9.03,27.95 R7.1 ; v1(13.2,19.1) 13.9,19.1 14.25,19.45 R18.1 ; C49.1 v1(13.05,35.2) ; C36.1 v1(24.75,27.7) ; C29.2 v1(24.05,19) ; C26.1 v1(3.08,17.08) ; C103.1 v1(56.65,39.9) 57.33,39.9 57.8,40.37 J14.5 ; R65.2 v1(26.75,27.7) ; R46.1 v1(4.55,16.5) ; v1(30.55,16.6) 30.55,16.22 30.02,15.69 R59.1 ; C35.1 v1(30.6,26.79) ; C61.1 42.23,38.69 42.67,38.25 R129.2 43.93,37.4 43.91,37.38 R127.1 42.64,36.95 42.16,36.47 C58.2 ; C61.1 v1(41.25,39.4) ; C86.1 v1(16.1,33.19) ; C34.1 v1(30.68,20.22) ; v1(23.75,27.7) C88.1 ; C102.2 v1(31.35,33.8) ; v1(31.35,39.4) C76.1 30.92,38.69 30.78,38.55 U30.3 ; R50.2 v1(21.55,19) ; R32.1 50.99,33.19 51.4,33.6 v1(54.6,33.6) ; C39.1 v1(26.65,33.8) ; U10.4 v1(37.89,23.68) ; C84.1 v1(16.09,37.99)
  BOTTOM w0.38: v1(5.73,25.21) 5.69,25.25 R79.1 ; C53.1 v1(41.99,42.09) ; C85.1 v1(2.2,31.4) ; v1(37.95,43.2) 38.7,43.2 38.9,43.4 U21.2 ; C47.1 4.35,33.38 4.73,33 v1(5.2,33) ; C52.1 v1(41.98,43.32) ; C1.1 v1(11.2,25.25) ; v1(47.5,27.45) 47.89,27.45 48.68,28.24 C90.1 48.68,29.35 48.9,29.57 C91.1 ; BT1.2 48.9,24.92 49.18,25.2 v1(49.7,25.2) ; C18.1 50.3,28.4 50.88,27.82 52.16,27.82 v1(52.6,28.26) ; R123.1 v1(14.25,31.3) ; R81.1 v1(2.05,20.9) ; R2.1 v1(11.13,22.65) ; R125.2 6.52,27.16 v1(6.51,27.17) C4.1 R11.1 ; C82.1 v1(12.15,31.3) ; C6.1 v1(12.15,19.1) ; R14.1 C5.1 v1(6.51,23.3) 6.52,23.31 R124.2 ; v1(36.05,39.4) C74.1 35.62,38.69 35.48,38.55 U32.3
  BOTTOM w0.4: C27.1 v1(10.4,13.45) ; C32.1 v1(24.5,13.45)
  BOTTOM w0.42: J3.2 v1(30.9,43) ; C50.1 v1(36,43.07) C51.1 ; J12.4 v1(22.8,43.5) ; J12.3 v1(21.8,43.5)
  BOTTOM w0.5: 47.16,19.52 49.04,19.52 v1(49.33,19.23) ; 47.16,19.52 47.36,19.72 47.36,20.41 C89.1 ; 47.16,19.52 C106.2
  vias: v1(1.5,17.9) v1(1.5,16.9) v1(1.5,15.9) v1(1.5,14.9) v1(1.5,13.9) v1(1.5,12.9) v1(1.5,11.9) v1(1.5,10.9) v1(1.5,9.9) v1(1.5,8.9) v1(1.5,7.9) v1(1.5,6.9) v1(1.5,5.9) v1(2.5,17.9) v1(3.5,17.9) v1(4.5,17.9) v1(5.4,10.8) v1(5.4,9.8) v1(5.5,17.9) v1(6,46.4) v1(6,1.5) v1(6.4,11) v1(6.4,10.3) v1(6.4,9.6) v1(6.5,17.9) v1(7,1.5) v1(7.4,10.8) v1(7.4,9.8) v1(7.5,17.9) v1(8,1.5) v1(8.5,46.4) v1(8.5,17.9) v1(9,1.5) v1(9.5,46.4) v1(9.5,17.9) v1(10,1.5) v1(10.5,46.4) v1(10.5,17.9) v1(11,1.5) v1(11.5,46.4) v1(11.5,17.9) v1(12.5,46.4) v1(12.5,17.9) v1(13,1.5) v1(13.5,46.4) v1(14,1.5) v1(14.5,46.4) v1(15,1.5) v1(16,1.5) v1(16.5,46.5) v1(17,1.5) v1(18,1.5) v1(18.1,42.1) v1(18.1,41.5) v1(18.7,42.1) v1(18.7,41.5) v1(19,1.5) v1(19.5,46.4) v1(20,1.5) v1(20.5,46.4) v1(21,1.5) v1(21.5,46.4) v1(22,1.5) v1(22.5,46.4) v1(23.5,46.4) v1(24,1.5) v1(24.5,46.4) v1(25,1.5) v1(25.5,46.4) v1(26,1.5) v1(26.9,46.4) v1(27,1.5) v1(27.6,10.8) v1(27.6,9.8) v1(27.8,46.4) v1(28,1.5) v1(28.6,11) v1(28.6,10.3) v1(28.6,9.6) v1(29,1.5) v1(29.5,46.4) v1(29.6,10.8) v1(29.6,9.8) v1(30,1.5) v1(30.5,46.4) v1(31,1.5) v1(31.5,46.4) v1(32,1.5) v1(32.5,46.4) v1(33,1.5) v1(33.5,46.4) v1(34,1.5) v1(35,1.5) v1(35.1,46.4) v1(36,1.5) v1(37,1.5) v1(38,1.5) v1(39,1.5) v1(40,1.5) v1(40.5,46.4) v1(41,1.5) v1(41.5,46.4) v1(42,1.5) v1(42.7,11) v1(42.7,9.7) v1(43,10.3) v1(43,1.5) v1(43.8,9.6) v1(43.9,11) v1(43.85,10.3) v1(44,1.5) v1(44.5,17.9) v1(44.6,10.3) v1(45,11) v1(45,9.7) v1(45,1.5) v1(45.5,17.9) v1(46,1.5) v1(46.5,46.4) v1(47,1.5) v1(47.5,46.4) v1(47.5,17.9) v1(48,1.5) v1(48.5,17.9) v1(49,1.5) v1(49.5,17.9) v1(50,1.5) v1(50.5,46.4) v1(50.5,17.9) v1(50.8,10.3) v1(50.8,9.6) v1(50.8,8.9) v1(50.8,8.2) v1(50.8,7.5) v1(51,1.5) v1(51.5,46.4) v1(51.5,17.9) v1(52,1.5) v1(52.5,17.9) v1(52.9,10.3) v1(52.9,9.6) v1(52.9,8.9) v1(52.9,8.2) v1(52.9,7.5) v1(53,1.5) v1(53.5,17.9) v1(54,46.4) v1(54,1.5) v1(54.3,27.5) v1(54.3,26.5) v1(54.3,25.5) v1(54.3,24.5) v1(54.3,23.5) v1(54.3,22.5) v1(54.3,21.5) v1(54.3,20.5) v1(54.3,19.5) v1(54.5,17.9) v1(55,46.4) v1(55,1.5) v1(55.5,17.9) v1(56,46.4) v1(56,1.5) v1(56.5,17.9) v1(57,46.4) v1(57,1.5) v1(57.5,17.9) v1(58,46.4) v1(58,1.5) v1(58.4,17.9) v1(59,46.4) v1(59,1.5) v1(60,1.5) v1(61,1.5) v1(61.2,24.1) v1(61.2,23.2) v1(61.2,21.8) v1(61.6,46.4) v1(61.9,23.7) v1(61.9,22.95) v1(61.9,22.1) v1(62,1.5) v1(62.6,24.1) v1(62.6,22.7) v1(62.6,21.8) v1(64.1,6.8) v1(64.2,17.9) v1(64.6,34.2) v1(65.17,6.83) v1(65.6,34.2) v1(66.6,34.2) v2(59.2,36.2) v3(1.6,43.3) v3(1.6,4.7) v3(2.9,43.2) v3(2.9,4.9) v3(4.1,43.8) v3(4.2,4.2) v3(4.7,46.3) v3(4.7,1.6) v3(4.8,44.9) v3(4.9,3) v3(63.1,2.9) v3(63.2,45.1) v3(63.3,46.4) v3(63.3,1.6) v3(63.7,4.1) v3(63.8,43.9) v3(64.8,4.8) v3(65,43.2) v3(66.3,43.3) v3(66.3,4.7)
